# EAGLE board sparkfun-9dof-razor-imu-Panel-v30 (EAGLE 7.5.0), part 1 of 6
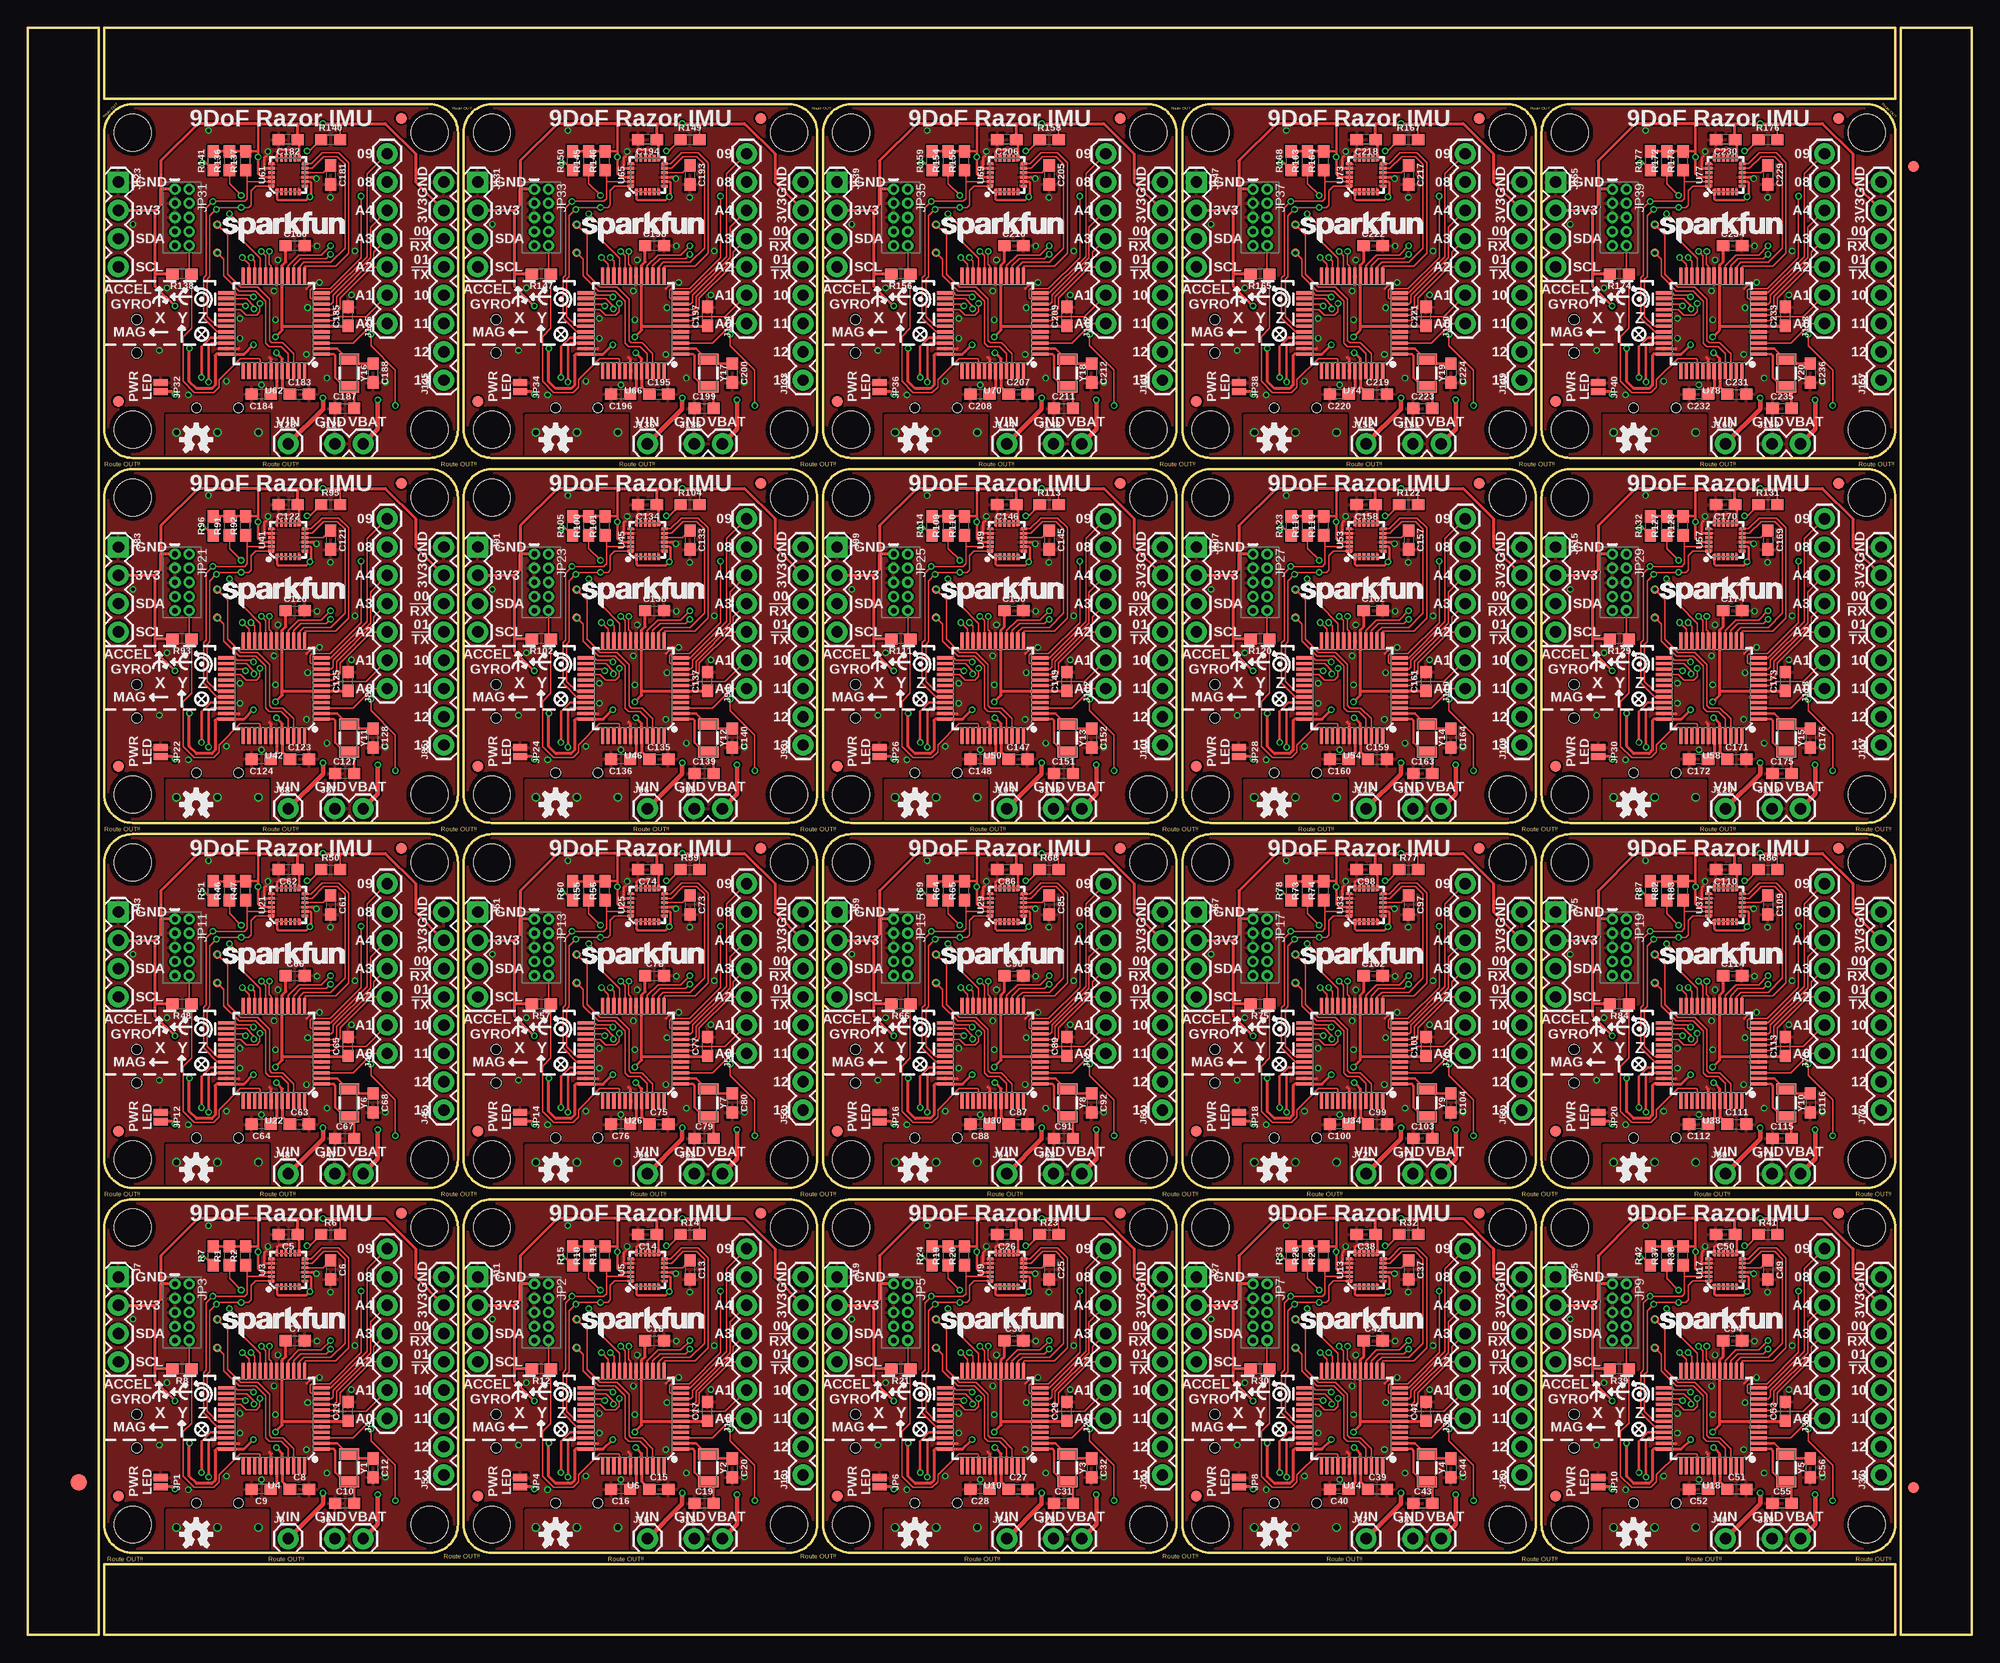
[diagram p0: board, top side]
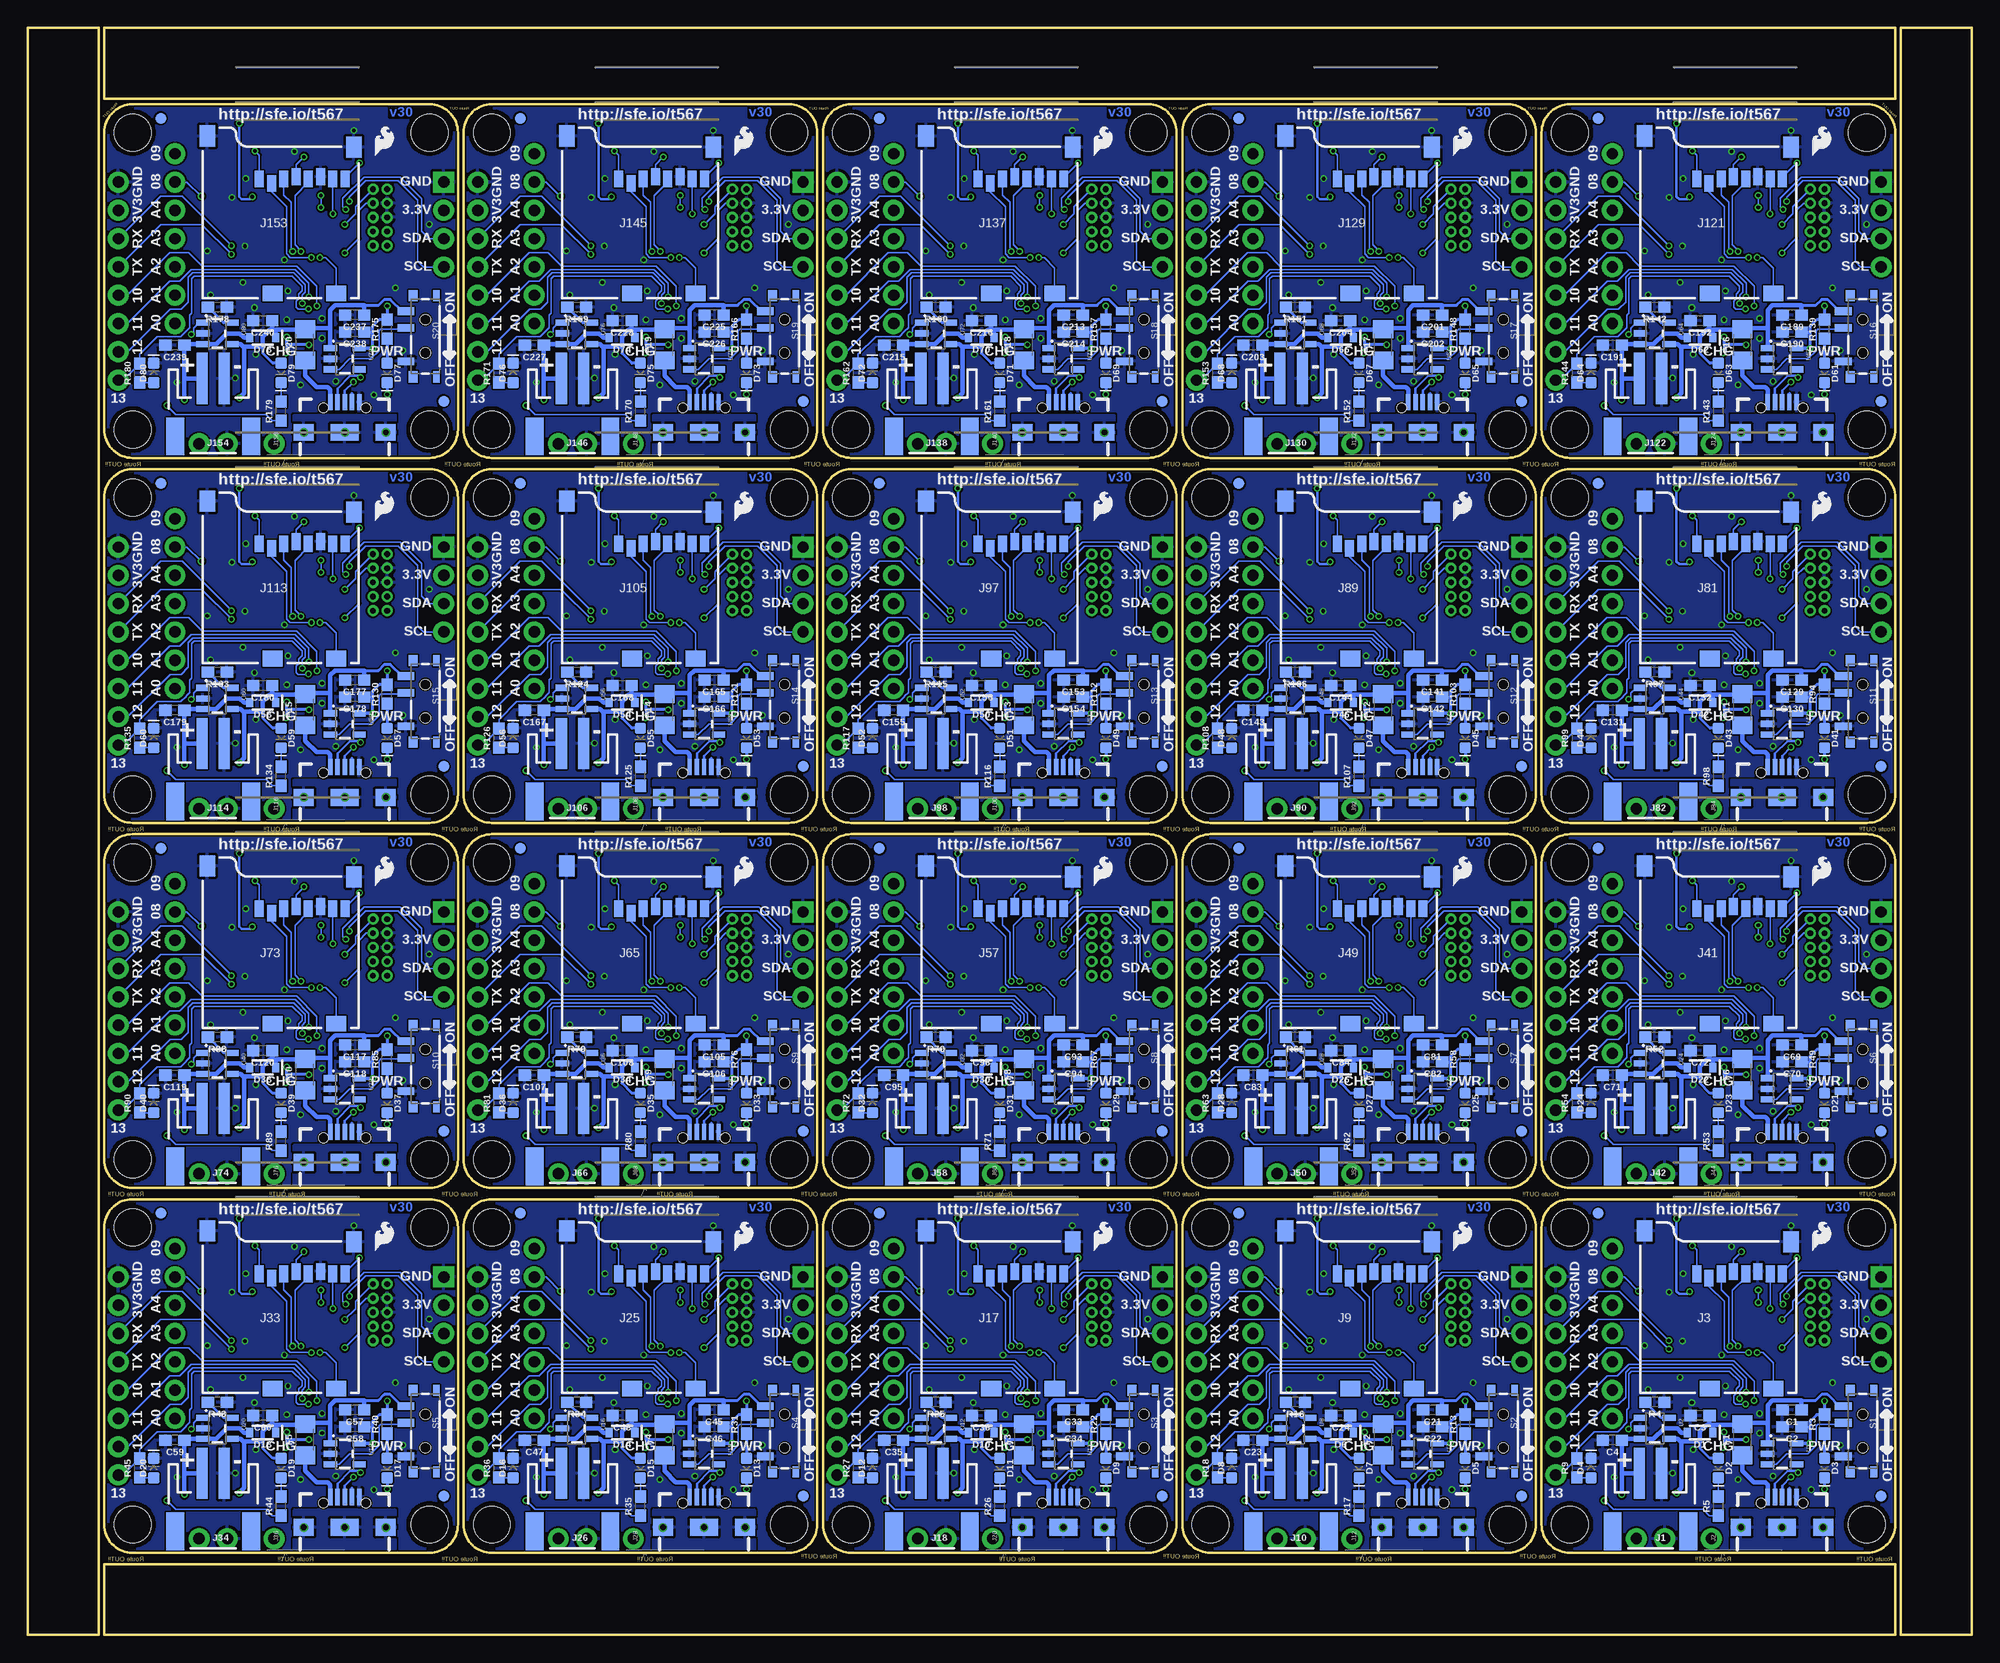
[diagram p1: board, bottom side, seen from below]

Size 174.5 x 144.27 mm. Coordinates in mm from the lower left corner, seen from the top.
Outline: 184 segments
Copper layers (1*16): Top 0.035mm / dielectric 1.5mm / Bottom 0.035mm
Design rules "SparkFun-2-layer-FAB-LIMIT *": minimum track width 4mil, minimum drill 6mil, track to track 6mil, track to pad 6mil, pad to pad 6mil, via to via 6mil, smd to smd 6mil, copper to edge 4mil, drill to drill 4mil, minimum pad ring 5mil, minimum via ring 5mil, stop-mask expansion 4mil, vias tented up to drill 25mil, thermal gap 10mil

## Footprints (pad centres in the part's own frame; a part is rotated, then mirrored left to right if it is on the bottom)
0603 = smd 1.1 x 1: 1 -0.85,0; 2 0.85,0
SOD-323 = smd 0.63 x 0.83: A 1.15,0; C -1.15,0
LED-0603 = smd 1 x 1: A -0.877,0; C 0.877,0
FIDUCIAL-1.5X3 = smd 1.5 x 1.5: 1 0,0
FIDUCIAL-1X2 = smd 1 x 1: 1 0,0
1206 = smd 1.6 x 1.8: 1 -1.4,0; 2 1.4,0
STAND-OFF = hole 3.302: 0,0
JST-2-SMD = smd 1 x 4.6: 1 -1,-3.7; 2 1,-3.7 | smd 1.6 x 3.4: NC1 -3.4,1.5; NC2 3.4,1.5
USB-B-MICRO-SMD_V03 = smd 1.45 x 0.4: D+ 2.725,0; D- 2.725,0.65; GND 2.725,-1.3; ID 2.725,-0.65; VBUS 2.725,1.3 | smd 1.5 x 1.8: SHIELD1 0,3.685; SHIELD2 0,-3.685 | smd 1.5 x 2.5: SHIELD3 0,0 | hole 0.85: 2.2,1.9; 2.2,-1.9
MICRO-SD-SOCKET-PP = smd 1.8 x 1.4: CD1 -2.05,0.4; CD2 -7.75,0.4 | smd 0.8 x 1.5: CS -7.84,10.3; DI -6.74,10.7; DO -2.34,10.7; GND -3.44,10.9; RSV1 -8.94,10.7; RSV2 -1.24,10.7; SCLK -4.54,10.7; VCC -5.64,10.9 | smd 1.4 x 1.9: GND1 -13.6,14.55; GND3 -0.45,13.55
1X07 = drill 1.016 pad 1.88: 1 0,0; 2 2.54,0; 3 5.08,0; 4 7.62,0; 5 10.16,0; 6 12.7,0; 7 15.24,0
1X08 = drill 1.016 pad 1.88: 1 0,0; 2 2.54,0; 3 5.08,0; 4 7.62,0; 5 10.16,0; 6 12.7,0; 7 15.24,0; 8 17.78,0
1X02 = drill 1.016 pad 1.88: 1 0,0; 2 2.54,0
1X04 = drill 1.016 pad 1.88 square: 1 0,0 | drill 1.016 pad 1.88: 2 2.54,0; 3 5.08,0; 4 7.62,0
1X01 = drill 1.016 pad 1.88: 1 0,0
SMT-JUMPER_2_NC_PASTE_NO-SILK = smd 0.635 x 1.27: 1 -0.406,0; 2 0.406,0
2X5-PTH-1.27MM = drill 0.508 pad 1: 1 -2.54,-0.635; 2 -2.54,0.635; 3 -1.27,-0.635; 4 -1.27,0.635; 5 0,-0.635; 6 0,0.635; 7 1.27,-0.635; 8 1.27,0.635; 9 2.54,-0.635; 10 2.54,0.635
SWITCH-SPST-SMD-A = smd 0.7 x 1.5: 1 -2.25,-1.75; 2 -0.75,-1.75; 3 2.25,-1.75 | smd 1 x 0.6: GND1 -3.65,1; GND3 3.65,1 | smd 1 x 0.8: GND2 -3.65,-1.1; GND4 3.65,-1.1 | hole 0.9: -1.5,0; 1.5,0
PAD.03X.03 = smd 0.762 x 0.762: P$1 0,0
SOT23-5 = smd 0.55 x 1.2: 1 -0.95,-1.3; 2 0,-1.3; 3 0.95,-1.3; 4 0.95,1.3; 5 -0.95,1.3
QFN24-3X3 = smd 0.495 x 0.25: 1 -1.552,1; 6 -1.552,-1; 13 1.552,-1; 18 1.552,1 | smd 0.6 x 0.25: 2 -1.5,0.6; 3 -1.5,0.2; 4 -1.5,-0.2; 5 -1.5,-0.6; 14 1.5,-0.6; 15 1.5,-0.2; 16 1.5,0.2; 17 1.5,0.6 | smd 0.25 x 0.495: 7 -1,-1.552; 12 1,-1.552; 19 1,1.552; 24 -1,1.552 | smd 0.25 x 0.6: 8 -0.6,-1.5; 9 -0.2,-1.5; 10 0.2,-1.5; 11 0.6,-1.5; 20 0.6,1.5; 21 0.2,1.5; 22 -0.2,1.5; 23 -0.6,1.5
TQFP-48 = smd 1.5 x 0.28: 1 -4.25,2.75; 2 -4.25,2.25; 3 -4.25,1.75; 4 -4.25,1.25; 5 -4.25,0.75; 6 -4.25,0.25; 7 -4.25,-0.25; 8 -4.25,-0.75; 9 -4.25,-1.25; 10 -4.25,-1.75; 11 -4.25,-2.25; 12 -4.25,-2.75; 25 4.25,-2.75; 26 4.25,-2.25; 27 4.25,-1.75; 28 4.25,-1.25; 29 4.25,-0.75; 30 4.25,-0.25; 31 4.25,0.25; 32 4.25,0.75; 33 4.25,1.25; 34 4.25,1.75; 35 4.25,2.25; 36 4.25,2.75 | smd 0.28 x 1.5: 13 -2.75,-4.25; 14 -2.25,-4.25; 15 -1.75,-4.25; 16 -1.25,-4.25; 17 -0.75,-4.25; 18 -0.25,-4.25; 19 0.25,-4.25; 20 0.75,-4.25; 21 1.25,-4.25; 22 1.75,-4.25; 23 2.25,-4.25; 24 2.75,-4.25; 37 2.75,4.25; 38 2.25,4.25; 39 1.75,4.25; 40 1.25,4.25; 41 0.75,4.25; 42 0.25,4.25; 43 -0.25,4.25; 44 -0.75,4.25; 45 -1.25,4.25; 46 -1.75,4.25; 47 -2.25,4.25; 48 -2.75,4.25
CRYSTAL-SMD-3.2X1.5MM = smd 1 x 1.8: P$1 -1.25,0; P$2 1.25,0

## Placement (x,y rotation side)
C1  1.0uF  [0603]  16.13,20.19 180 bottom
C2  2.2uF  [0603]  16.13,18.67 180 bottom
C3  4.7uF  [0603]  24.38,19.68 180 bottom
C4  4.7uF  [0603]  32.26,17.48 180 bottom
C5  0.1uF  [0603]  23.37,35.94 180 top
C6  0.1uF  [0603]  27.18,32.77 270 top
C7  0.1uF  [0603]  24,26.42 0 top
C8  0.1uF  [0603]  24.38,13.08 0 top
C9  0.1uF  [0603]  20.95,13.08 180 top
C10  15pF  [0603]  28.45,11.81 0 top
C11  0.1uF  [0603]  28.75,20.07 90 top
C12  15pF  [0603]  30.99,14.99 270 top
C13  0.1uF  [0603]  59.44,32.77 270 top
C14  0.1uF  [0603]  55.63,35.94 180 top
C15  0.1uF  [0603]  56.64,13.08 0 top
C16  0.1uF  [0603]  53.21,13.08 180 top
C17  0.1uF  [0603]  61.01,20.07 90 top
C18  0.1uF  [0603]  56.26,26.42 0 top
C19  15pF  [0603]  60.71,11.81 0 top
C20  15pF  [0603]  63.25,14.99 270 top
C21  1.0uF  [0603]  48.39,20.19 180 bottom
C22  2.2uF  [0603]  48.39,18.67 180 bottom
C23  4.7uF  [0603]  64.52,17.48 180 bottom
C24  4.7uF  [0603]  56.64,19.68 180 bottom
C25  0.1uF  [0603]  91.69,32.77 270 top
C26  0.1uF  [0603]  87.88,35.94 180 top
C27  0.1uF  [0603]  88.9,13.08 0 top
C28  0.1uF  [0603]  85.47,13.08 180 top
C29  0.1uF  [0603]  93.27,20.07 90 top
C30  0.1uF  [0603]  88.52,26.42 0 top
C31  15pF  [0603]  92.96,11.81 0 top
C32  15pF  [0603]  95.5,14.99 270 top
C33  1.0uF  [0603]  80.64,20.19 180 bottom
C34  2.2uF  [0603]  80.64,18.67 180 bottom
C35  4.7uF  [0603]  96.77,17.48 180 bottom
C36  4.7uF  [0603]  88.9,19.68 180 bottom
C37  0.1uF  [0603]  123.95,32.77 270 top
C38  0.1uF  [0603]  120.14,35.94 180 top
C39  0.1uF  [0603]  121.16,13.08 0 top
C40  0.1uF  [0603]  117.73,13.08 180 top
C41  0.1uF  [0603]  125.53,20.07 90 top
C42  0.1uF  [0603]  120.78,26.42 0 top
C43  15pF  [0603]  125.22,11.81 0 top
C44  15pF  [0603]  127.76,14.99 270 top
C45  1.0uF  [0603]  112.9,20.19 180 bottom
C46  2.2uF  [0603]  112.9,18.67 180 bottom
C47  4.7uF  [0603]  129.03,17.48 180 bottom
C48  4.7uF  [0603]  121.16,19.68 180 bottom
C49  0.1uF  [0603]  156.21,32.77 270 top
C50  0.1uF  [0603]  152.4,35.94 180 top
C51  0.1uF  [0603]  153.42,13.08 0 top
C52  0.1uF  [0603]  149.99,13.08 180 top
C53  0.1uF  [0603]  157.78,20.07 90 top
C54  0.1uF  [0603]  153.03,26.42 0 top
C55  15pF  [0603]  157.48,11.81 0 top
C56  15pF  [0603]  160.02,14.99 270 top
C57  1.0uF  [0603]  145.16,20.19 180 bottom
C58  2.2uF  [0603]  145.16,18.67 180 bottom
C59  4.7uF  [0603]  161.29,17.48 180 bottom
C60  4.7uF  [0603]  153.42,19.68 180 bottom
C61  0.1uF  [0603]  27.18,65.53 270 top
C62  0.1uF  [0603]  23.37,68.71 180 top
C63  0.1uF  [0603]  24.38,45.85 0 top
C64  0.1uF  [0603]  20.95,45.85 180 top
C65  0.1uF  [0603]  28.75,52.83 90 top
C66  0.1uF  [0603]  24,59.18 0 top
C67  15pF  [0603]  28.45,44.58 0 top
C68  15pF  [0603]  30.99,47.75 270 top
C69  1.0uF  [0603]  16.13,52.96 180 bottom
C70  2.2uF  [0603]  16.13,51.44 180 bottom
C71  4.7uF  [0603]  32.26,50.24 180 bottom
C72  4.7uF  [0603]  24.38,52.45 180 bottom
C73  0.1uF  [0603]  59.44,65.53 270 top
C74  0.1uF  [0603]  55.63,68.71 180 top
C75  0.1uF  [0603]  56.64,45.85 0 top
C76  0.1uF  [0603]  53.21,45.85 180 top
C77  0.1uF  [0603]  61.01,52.83 90 top
C78  0.1uF  [0603]  56.26,59.18 0 top
C79  15pF  [0603]  60.71,44.58 0 top
C80  15pF  [0603]  63.25,47.75 270 top
C81  1.0uF  [0603]  48.39,52.96 180 bottom
C82  2.2uF  [0603]  48.39,51.44 180 bottom
C83  4.7uF  [0603]  64.52,50.24 180 bottom
C84  4.7uF  [0603]  56.64,52.45 180 bottom
C85  0.1uF  [0603]  91.69,65.53 270 top
C86  0.1uF  [0603]  87.88,68.71 180 top
C87  0.1uF  [0603]  88.9,45.85 0 top
C88  0.1uF  [0603]  85.47,45.85 180 top
C89  0.1uF  [0603]  93.27,52.83 90 top
C90  0.1uF  [0603]  88.52,59.18 0 top
C91  15pF  [0603]  92.96,44.58 0 top
C92  15pF  [0603]  95.5,47.75 270 top
C93  1.0uF  [0603]  80.64,52.96 180 bottom
C94  2.2uF  [0603]  80.64,51.44 180 bottom
C95  4.7uF  [0603]  96.77,50.24 180 bottom
C96  4.7uF  [0603]  88.9,52.45 180 bottom
C97  0.1uF  [0603]  123.95,65.53 270 top
C98  0.1uF  [0603]  120.14,68.71 180 top
C99  0.1uF  [0603]  121.16,45.85 0 top
C100  0.1uF  [0603]  117.73,45.85 180 top
C101  0.1uF  [0603]  125.53,52.83 90 top
C102  0.1uF  [0603]  120.78,59.18 0 top
C103  15pF  [0603]  125.22,44.58 0 top
C104  15pF  [0603]  127.76,47.75 270 top
C105  1.0uF  [0603]  112.9,52.96 180 bottom
C106  2.2uF  [0603]  112.9,51.44 180 bottom
C107  4.7uF  [0603]  129.03,50.24 180 bottom
C108  4.7uF  [0603]  121.16,52.45 180 bottom
C109  0.1uF  [0603]  156.21,65.53 270 top
C110  0.1uF  [0603]  152.4,68.71 180 top
C111  0.1uF  [0603]  153.42,45.85 0 top
C112  0.1uF  [0603]  149.99,45.85 180 top
C113  0.1uF  [0603]  157.78,52.83 90 top
C114  0.1uF  [0603]  153.03,59.18 0 top
C115  15pF  [0603]  157.48,44.58 0 top
C116  15pF  [0603]  160.02,47.75 270 top
C117  1.0uF  [0603]  145.16,52.96 180 bottom
C118  2.2uF  [0603]  145.16,51.44 180 bottom
C119  4.7uF  [0603]  161.29,50.24 180 bottom
C120  4.7uF  [0603]  153.42,52.45 180 bottom
C121  0.1uF  [0603]  27.18,98.3 270 top
C122  0.1uF  [0603]  23.37,101.47 180 top
C123  0.1uF  [0603]  24.38,78.61 0 top
C124  0.1uF  [0603]  20.95,78.61 180 top
C125  0.1uF  [0603]  28.75,85.6 90 top
C126  0.1uF  [0603]  24,91.95 0 top
C127  15pF  [0603]  28.45,77.34 0 top
C128  15pF  [0603]  30.99,80.52 270 top
C129  1.0uF  [0603]  16.13,85.72 180 bottom
C130  2.2uF  [0603]  16.13,84.2 180 bottom
C131  4.7uF  [0603]  32.26,83.01 180 bottom
C132  4.7uF  [0603]  24.38,85.22 180 bottom
C133  0.1uF  [0603]  59.44,98.3 270 top
C134  0.1uF  [0603]  55.63,101.47 180 top
C135  0.1uF  [0603]  56.64,78.61 0 top
C136  0.1uF  [0603]  53.21,78.61 180 top
C137  0.1uF  [0603]  61.01,85.6 90 top
C138  0.1uF  [0603]  56.26,91.95 0 top
C139  15pF  [0603]  60.71,77.34 0 top
C140  15pF  [0603]  63.25,80.52 270 top
C141  1.0uF  [0603]  48.39,85.72 180 bottom
C142  2.2uF  [0603]  48.39,84.2 180 bottom
C143  4.7uF  [0603]  64.52,83.01 180 bottom
C144  4.7uF  [0603]  56.64,85.22 180 bottom
C145  0.1uF  [0603]  91.69,98.3 270 top
C146  0.1uF  [0603]  87.88,101.47 180 top
C147  0.1uF  [0603]  88.9,78.61 0 top
C148  0.1uF  [0603]  85.47,78.61 180 top
C149  0.1uF  [0603]  93.27,85.6 90 top
C150  0.1uF  [0603]  88.52,91.95 0 top
C151  15pF  [0603]  92.96,77.34 0 top
C152  15pF  [0603]  95.5,80.52 270 top
C153  1.0uF  [0603]  80.64,85.72 180 bottom
C154  2.2uF  [0603]  80.64,84.2 180 bottom
C155  4.7uF  [0603]  96.77,83.01 180 bottom
C156  4.7uF  [0603]  88.9,85.22 180 bottom
C157  0.1uF  [0603]  123.95,98.3 270 top
C158  0.1uF  [0603]  120.14,101.47 180 top
C159  0.1uF  [0603]  121.16,78.61 0 top
C160  0.1uF  [0603]  117.73,78.61 180 top
C161  0.1uF  [0603]  125.53,85.6 90 top
C162  0.1uF  [0603]  120.78,91.95 0 top
C163  15pF  [0603]  125.22,77.34 0 top
C164  15pF  [0603]  127.76,80.52 270 top
C165  1.0uF  [0603]  112.9,85.72 180 bottom
C166  2.2uF  [0603]  112.9,84.2 180 bottom
C167  4.7uF  [0603]  129.03,83.01 180 bottom
C168  4.7uF  [0603]  121.16,85.22 180 bottom
C169  0.1uF  [0603]  156.21,98.3 270 top
C170  0.1uF  [0603]  152.4,101.47 180 top
C171  0.1uF  [0603]  153.42,78.61 0 top
C172  0.1uF  [0603]  149.99,78.61 180 top
C173  0.1uF  [0603]  157.78,85.6 90 top
C174  0.1uF  [0603]  153.03,91.95 0 top
C175  15pF  [0603]  157.48,77.34 0 top
C176  15pF  [0603]  160.02,80.52 270 top
C177  1.0uF  [0603]  145.16,85.72 180 bottom
C178  2.2uF  [0603]  145.16,84.2 180 bottom
C179  4.7uF  [0603]  161.29,83.01 180 bottom
C180  4.7uF  [0603]  153.42,85.22 180 bottom
C181  0.1uF  [0603]  27.18,131.06 270 top
C182  0.1uF  [0603]  23.37,134.24 180 top
C183  0.1uF  [0603]  24.38,111.38 0 top
C184  0.1uF  [0603]  20.95,111.38 180 top
C185  0.1uF  [0603]  28.75,118.36 90 top
C186  0.1uF  [0603]  24,124.71 0 top
C187  15pF  [0603]  28.45,110.11 0 top
C188  15pF  [0603]  30.99,113.28 270 top
C189  1.0uF  [0603]  16.13,118.49 180 bottom
C190  2.2uF  [0603]  16.13,116.97 180 bottom
C191  4.7uF  [0603]  32.26,115.77 180 bottom
C192  4.7uF  [0603]  24.38,117.98 180 bottom
C193  0.1uF  [0603]  59.44,131.06 270 top
C194  0.1uF  [0603]  55.63,134.24 180 top
C195  0.1uF  [0603]  56.64,111.38 0 top
C196  0.1uF  [0603]  53.21,111.38 180 top
C197  0.1uF  [0603]  61.01,118.36 90 top
C198  0.1uF  [0603]  56.26,124.71 0 top
C199  15pF  [0603]  60.71,110.11 0 top
C200  15pF  [0603]  63.25,113.28 270 top
C201  1.0uF  [0603]  48.39,118.49 180 bottom
C202  2.2uF  [0603]  48.39,116.97 180 bottom
C203  4.7uF  [0603]  64.52,115.77 180 bottom
C204  4.7uF  [0603]  56.64,117.98 180 bottom
C205  0.1uF  [0603]  91.69,131.06 270 top
C206  0.1uF  [0603]  87.88,134.24 180 top
C207  0.1uF  [0603]  88.9,111.38 0 top
C208  0.1uF  [0603]  85.47,111.38 180 top
C209  0.1uF  [0603]  93.27,118.36 90 top
C210  0.1uF  [0603]  88.52,124.71 0 top
C211  15pF  [0603]  92.96,110.11 0 top
C212  15pF  [0603]  95.5,113.28 270 top
C213  1.0uF  [0603]  80.64,118.49 180 bottom
C214  2.2uF  [0603]  80.64,116.97 180 bottom
C215  4.7uF  [0603]  96.77,115.77 180 bottom
C216  4.7uF  [0603]  88.9,117.98 180 bottom
C217  0.1uF  [0603]  123.95,131.06 270 top
C218  0.1uF  [0603]  120.14,134.24 180 top
C219  0.1uF  [0603]  121.16,111.38 0 top
C220  0.1uF  [0603]  117.73,111.38 180 top
C221  0.1uF  [0603]  125.53,118.36 90 top
C222  0.1uF  [0603]  120.78,124.71 0 top
C223  15pF  [0603]  125.22,110.11 0 top
C224  15pF  [0603]  127.76,113.28 270 top
C225  1.0uF  [0603]  112.9,118.49 180 bottom
C226  2.2uF  [0603]  112.9,116.97 180 bottom
C227  4.7uF  [0603]  129.03,115.77 180 bottom
C228  4.7uF  [0603]  121.16,117.98 180 bottom
C229  0.1uF  [0603]  156.21,131.06 270 top
C230  0.1uF  [0603]  152.4,134.24 180 top
C231  0.1uF  [0603]  153.42,111.38 0 top
C232  0.1uF  [0603]  149.99,111.38 180 top
C233  0.1uF  [0603]  157.78,118.36 90 top
C234  0.1uF  [0603]  153.03,124.71 0 top
C235  15pF  [0603]  157.48,110.11 0 top
C236  15pF  [0603]  160.02,113.28 270 top
C237  1.0uF  [0603]  145.16,118.49 180 bottom
C238  2.2uF  [0603]  145.16,116.97 180 bottom
C239  4.7uF  [0603]  161.29,115.77 180 bottom
C240  4.7uF  [0603]  153.42,117.98 180 bottom
D1  1A/23V/620mV  [SOD-323]  24.38,18.16 180 bottom
D2  Yellow  [LED-0603]  22.73,14.99 270 bottom
D3  RED  [LED-0603]  13.21,14.99 270 bottom
D4  BLUE  [LED-0603]  34.16,14.99 90 bottom
D5  RED  [LED-0603]  45.47,14.99 270 bottom
D6  1A/23V/620mV  [SOD-323]  56.64,18.16 180 bottom
D7  Yellow  [LED-0603]  54.99,14.99 270 bottom
D8  BLUE  [LED-0603]  66.42,14.99 90 bottom
D9  RED  [LED-0603]  77.72,14.99 270 bottom
D10  1A/23V/620mV  [SOD-323]  88.9,18.16 180 bottom
D11  Yellow  [LED-0603]  87.25,14.99 270 bottom
D12  BLUE  [LED-0603]  98.68,14.99 90 bottom
D13  RED  [LED-0603]  109.98,14.99 270 bottom
D14  1A/23V/620mV  [SOD-323]  121.16,18.16 180 bottom
D15  Yellow  [LED-0603]  119.51,14.99 270 bottom
D16  BLUE  [LED-0603]  130.94,14.99 90 bottom
D17  RED  [LED-0603]  142.24,14.99 270 bottom
D18  1A/23V/620mV  [SOD-323]  153.42,18.16 180 bottom
D19  Yellow  [LED-0603]  151.76,14.99 270 bottom
D20  BLUE  [LED-0603]  163.19,14.99 90 bottom
D21  RED  [LED-0603]  13.21,47.75 270 bottom
D22  1A/23V/620mV  [SOD-323]  24.38,50.93 180 bottom
D23  Yellow  [LED-0603]  22.73,47.75 270 bottom
D24  BLUE  [LED-0603]  34.16,47.75 90 bottom
D25  RED  [LED-0603]  45.47,47.75 270 bottom
D26  1A/23V/620mV  [SOD-323]  56.64,50.93 180 bottom
D27  Yellow  [LED-0603]  54.99,47.75 270 bottom
D28  BLUE  [LED-0603]  66.42,47.75 90 bottom
D29  RED  [LED-0603]  77.72,47.75 270 bottom
D30  1A/23V/620mV  [SOD-323]  88.9,50.93 180 bottom
D31  Yellow  [LED-0603]  87.25,47.75 270 bottom
D32  BLUE  [LED-0603]  98.68,47.75 90 bottom
D33  RED  [LED-0603]  109.98,47.75 270 bottom
D34  1A/23V/620mV  [SOD-323]  121.16,50.93 180 bottom
D35  Yellow  [LED-0603]  119.51,47.75 270 bottom
D36  BLUE  [LED-0603]  130.94,47.75 90 bottom
D37  RED  [LED-0603]  142.24,47.75 270 bottom
D38  1A/23V/620mV  [SOD-323]  153.42,50.93 180 bottom
D39  Yellow  [LED-0603]  151.76,47.75 270 bottom
D40  BLUE  [LED-0603]  163.19,47.75 90 bottom
D41  RED  [LED-0603]  13.21,80.52 270 bottom
D42  1A/23V/620mV  [SOD-323]  24.38,83.69 180 bottom
D43  Yellow  [LED-0603]  22.73,80.52 270 bottom
D44  BLUE  [LED-0603]  34.16,80.52 90 bottom
D45  RED  [LED-0603]  45.47,80.52 270 bottom
D46  1A/23V/620mV  [SOD-323]  56.64,83.69 180 bottom
D47  Yellow  [LED-0603]  54.99,80.52 270 bottom
D48  BLUE  [LED-0603]  66.42,80.52 90 bottom
D49  RED  [LED-0603]  77.72,80.52 270 bottom
D50  1A/23V/620mV  [SOD-323]  88.9,83.69 180 bottom
D51  Yellow  [LED-0603]  87.25,80.52 270 bottom
D52  BLUE  [LED-0603]  98.68,80.52 90 bottom
D53  RED  [LED-0603]  109.98,80.52 270 bottom
D54  1A/23V/620mV  [SOD-323]  121.16,83.69 180 bottom
D55  Yellow  [LED-0603]  119.51,80.52 270 bottom
D56  BLUE  [LED-0603]  130.94,80.52 90 bottom
D57  RED  [LED-0603]  142.24,80.52 270 bottom
D58  1A/23V/620mV  [SOD-323]  153.42,83.69 180 bottom
D59  Yellow  [LED-0603]  151.76,80.52 270 bottom
D60  BLUE  [LED-0603]  163.19,80.52 90 bottom
D61  RED  [LED-0603]  13.21,113.28 270 bottom
D62  1A/23V/620mV  [SOD-323]  24.38,116.46 180 bottom
D63  Yellow  [LED-0603]  22.73,113.28 270 bottom
D64  BLUE  [LED-0603]  34.16,113.28 90 bottom
D65  RED  [LED-0603]  45.47,113.28 270 bottom
D66  1A/23V/620mV  [SOD-323]  56.64,116.46 180 bottom
D67  Yellow  [LED-0603]  54.99,113.28 270 bottom
D68  BLUE  [LED-0603]  66.42,113.28 90 bottom
D69  RED  [LED-0603]  77.72,113.28 270 bottom
D70  1A/23V/620mV  [SOD-323]  88.9,116.46 180 bottom
D71  Yellow  [LED-0603]  87.25,113.28 270 bottom
D72  BLUE  [LED-0603]  98.68,113.28 90 bottom
D73  RED  [LED-0603]  109.98,113.28 270 bottom
D74  1A/23V/620mV  [SOD-323]  121.16,116.46 180 bottom
D75  Yellow  [LED-0603]  119.51,113.28 270 bottom
D76  BLUE  [LED-0603]  130.94,113.28 90 bottom
D77  RED  [LED-0603]  142.24,113.28 270 bottom
D78  1A/23V/620mV  [SOD-323]  153.42,116.46 180 bottom
D79  Yellow  [LED-0603]  151.76,113.28 270 bottom
D80  BLUE  [LED-0603]  163.19,113.28 90 bottom
E$1  [FIDUCIAL-1.5X3]  4.57,13.72 0 top
E$7  [FIDUCIAL-1X2]  169.29,131.83 180 top
E$8  [FIDUCIAL-1X2]  169.29,13.21 0 top
F1  6V/0.5A  [1206]  20.57,17.53 90 bottom
F2  6V/0.5A  [1206]  52.83,17.53 90 bottom
F3  6V/0.5A  [1206]  85.09,17.53 90 bottom
F4  6V/0.5A  [1206]  117.35,17.53 90 bottom
F5  6V/0.5A  [1206]  149.61,17.53 90 bottom
F6  6V/0.5A  [1206]  20.57,50.29 90 bottom
F7  6V/0.5A  [1206]  52.83,50.29 90 bottom
F8  6V/0.5A  [1206]  85.09,50.29 90 bottom
F9  6V/0.5A  [1206]  117.35,50.29 90 bottom
F10  6V/0.5A  [1206]  149.61,50.29 90 bottom
F11  6V/0.5A  [1206]  20.57,83.06 90 bottom
F12  6V/0.5A  [1206]  52.83,83.06 90 bottom
F13  6V/0.5A  [1206]  85.09,83.06 90 bottom
F14  6V/0.5A  [1206]  117.35,83.06 90 bottom
F15  6V/0.5A  [1206]  149.61,83.06 90 bottom
F16  6V/0.5A  [1206]  20.57,115.82 90 bottom
F17  6V/0.5A  [1206]  52.83,115.82 90 bottom
F18  6V/0.5A  [1206]  85.09,115.82 90 bottom
F19  6V/0.5A  [1206]  117.35,115.82 90 bottom
F20  6V/0.5A  [1206]  149.61,115.82 90 bottom
FD1  FIDUCIAL1X2  [FIDUCIAL-1X2]  8.13,12.45 0 bottom
FD2  FIDUCIAL1X2  [FIDUCIAL-1X2]  33.53,37.85 0 top
FD3  FIDUCIAL1X2  [FIDUCIAL-1X2]  33.53,37.85 0 bottom
FD4  FIDUCIAL1X2  [FIDUCIAL-1X2]  8.13,12.45 0 top
FD5  FIDUCIAL1X2  [FIDUCIAL-1X2]  40.39,12.45 0 top
FD6  FIDUCIAL1X2  [FIDUCIAL-1X2]  65.79,37.85 0 top
FD7  FIDUCIAL1X2  [FIDUCIAL-1X2]  40.39,12.45 0 bottom
FD8  FIDUCIAL1X2  [FIDUCIAL-1X2]  65.79,37.85 0 bottom
FD9  FIDUCIAL1X2  [FIDUCIAL-1X2]  72.64,12.45 0 top
FD10  FIDUCIAL1X2  [FIDUCIAL-1X2]  98.04,37.85 0 top
FD11  FIDUCIAL1X2  [FIDUCIAL-1X2]  72.64,12.45 0 bottom
FD12  FIDUCIAL1X2  [FIDUCIAL-1X2]  98.04,37.85 0 bottom
FD13  FIDUCIAL1X2  [FIDUCIAL-1X2]  104.9,12.45 0 top
FD14  FIDUCIAL1X2  [FIDUCIAL-1X2]  130.3,37.85 0 top
FD15  FIDUCIAL1X2  [FIDUCIAL-1X2]  104.9,12.45 0 bottom
FD16  FIDUCIAL1X2  [FIDUCIAL-1X2]  130.3,37.85 0 bottom
FD17  FIDUCIAL1X2  [FIDUCIAL-1X2]  137.16,12.45 0 top
FD18  FIDUCIAL1X2  [FIDUCIAL-1X2]  162.56,37.85 0 top
FD19  FIDUCIAL1X2  [FIDUCIAL-1X2]  137.16,12.45 0 bottom
FD20  FIDUCIAL1X2  [FIDUCIAL-1X2]  162.56,37.85 0 bottom
FD21  FIDUCIAL1X2  [FIDUCIAL-1X2]  8.13,45.21 0 top
FD22  FIDUCIAL1X2  [FIDUCIAL-1X2]  33.53,70.61 0 top
FD23  FIDUCIAL1X2  [FIDUCIAL-1X2]  8.13,45.21 0 bottom
FD24  FIDUCIAL1X2  [FIDUCIAL-1X2]  33.53,70.61 0 bottom
FD25  FIDUCIAL1X2  [FIDUCIAL-1X2]  40.39,45.21 0 top
FD26  FIDUCIAL1X2  [FIDUCIAL-1X2]  65.79,70.61 0 top
FD27  FIDUCIAL1X2  [FIDUCIAL-1X2]  40.39,45.21 0 bottom
FD28  FIDUCIAL1X2  [FIDUCIAL-1X2]  65.79,70.61 0 bottom
FD29  FIDUCIAL1X2  [FIDUCIAL-1X2]  72.64,45.21 0 top
FD30  FIDUCIAL1X2  [FIDUCIAL-1X2]  98.04,70.61 0 top
FD31  FIDUCIAL1X2  [FIDUCIAL-1X2]  72.64,45.21 0 bottom
FD32  FIDUCIAL1X2  [FIDUCIAL-1X2]  98.04,70.61 0 bottom
FD33  FIDUCIAL1X2  [FIDUCIAL-1X2]  104.9,45.21 0 top
FD34  FIDUCIAL1X2  [FIDUCIAL-1X2]  130.3,70.61 0 top
FD35  FIDUCIAL1X2  [FIDUCIAL-1X2]  104.9,45.21 0 bottom
FD36  FIDUCIAL1X2  [FIDUCIAL-1X2]  130.3,70.61 0 bottom
FD37  FIDUCIAL1X2  [FIDUCIAL-1X2]  137.16,45.21 0 top
FD38  FIDUCIAL1X2  [FIDUCIAL-1X2]  162.56,70.61 0 top
FD39  FIDUCIAL1X2  [FIDUCIAL-1X2]  137.16,45.21 0 bottom
FD40  FIDUCIAL1X2  [FIDUCIAL-1X2]  162.56,70.61 0 bottom
FD41  FIDUCIAL1X2  [FIDUCIAL-1X2]  8.13,77.98 0 top
FD42  FIDUCIAL1X2  [FIDUCIAL-1X2]  33.53,103.38 0 top
FD43  FIDUCIAL1X2  [FIDUCIAL-1X2]  8.13,77.98 0 bottom
FD44  FIDUCIAL1X2  [FIDUCIAL-1X2]  33.53,103.38 0 bottom
FD45  FIDUCIAL1X2  [FIDUCIAL-1X2]  40.39,77.98 0 top
FD46  FIDUCIAL1X2  [FIDUCIAL-1X2]  65.79,103.38 0 top
FD47  FIDUCIAL1X2  [FIDUCIAL-1X2]  40.39,77.98 0 bottom
FD48  FIDUCIAL1X2  [FIDUCIAL-1X2]  65.79,103.38 0 bottom
FD49  FIDUCIAL1X2  [FIDUCIAL-1X2]  72.64,77.98 0 top
FD50  FIDUCIAL1X2  [FIDUCIAL-1X2]  98.04,103.38 0 top
FD51  FIDUCIAL1X2  [FIDUCIAL-1X2]  72.64,77.98 0 bottom
FD52  FIDUCIAL1X2  [FIDUCIAL-1X2]  98.04,103.38 0 bottom
FD53  FIDUCIAL1X2  [FIDUCIAL-1X2]  104.9,77.98 0 top
FD54  FIDUCIAL1X2  [FIDUCIAL-1X2]  130.3,103.38 0 top
FD55  FIDUCIAL1X2  [FIDUCIAL-1X2]  104.9,77.98 0 bottom
FD56  FIDUCIAL1X2  [FIDUCIAL-1X2]  130.3,103.38 0 bottom
FD57  FIDUCIAL1X2  [FIDUCIAL-1X2]  137.16,77.98 0 top
FD58  FIDUCIAL1X2  [FIDUCIAL-1X2]  162.56,103.38 0 top
FD59  FIDUCIAL1X2  [FIDUCIAL-1X2]  137.16,77.98 0 bottom
FD60  FIDUCIAL1X2  [FIDUCIAL-1X2]  162.56,103.38 0 bottom
FD61  FIDUCIAL1X2  [FIDUCIAL-1X2]  8.13,110.74 0 top
FD62  FIDUCIAL1X2  [FIDUCIAL-1X2]  33.53,136.14 0 top
FD63  FIDUCIAL1X2  [FIDUCIAL-1X2]  8.13,110.74 0 bottom
FD64  FIDUCIAL1X2  [FIDUCIAL-1X2]  33.53,136.14 0 bottom
FD65  FIDUCIAL1X2  [FIDUCIAL-1X2]  40.39,110.74 0 top
FD66  FIDUCIAL1X2  [FIDUCIAL-1X2]  65.79,136.14 0 top
FD67  FIDUCIAL1X2  [FIDUCIAL-1X2]  40.39,110.74 0 bottom
FD68  FIDUCIAL1X2  [FIDUCIAL-1X2]  65.79,136.14 0 bottom
FD69  FIDUCIAL1X2  [FIDUCIAL-1X2]  72.64,110.74 0 top
FD70  FIDUCIAL1X2  [FIDUCIAL-1X2]  98.04,136.14 0 top
FD71  FIDUCIAL1X2  [FIDUCIAL-1X2]  72.64,110.74 0 bottom
FD72  FIDUCIAL1X2  [FIDUCIAL-1X2]  98.04,136.14 0 bottom
FD73  FIDUCIAL1X2  [FIDUCIAL-1X2]  104.9,110.74 0 top
FD74  FIDUCIAL1X2  [FIDUCIAL-1X2]  130.3,136.14 0 top
FD75  FIDUCIAL1X2  [FIDUCIAL-1X2]  104.9,110.74 0 bottom
FD76  FIDUCIAL1X2  [FIDUCIAL-1X2]  130.3,136.14 0 bottom
FD77  FIDUCIAL1X2  [FIDUCIAL-1X2]  137.16,110.74 0 top
FD78  FIDUCIAL1X2  [FIDUCIAL-1X2]  162.56,136.14 0 top
FD79  FIDUCIAL1X2  [FIDUCIAL-1X2]  137.16,110.74 0 bottom
FD80  FIDUCIAL1X2  [FIDUCIAL-1X2]  162.56,136.14 0 bottom
H1  STAND-OFF  [STAND-OFF]  36.07,9.91 0 top
H2  STAND-OFF  [STAND-OFF]  9.4,9.91 0 top
H3  STAND-OFF  [STAND-OFF]  36.07,36.58 0 top
H4  STAND-OFF  [STAND-OFF]  9.4,36.58 0 top
H5  STAND-OFF  [STAND-OFF]  68.33,9.91 0 top
H6  STAND-OFF  [STAND-OFF]  41.66,9.91 0 top
H7  STAND-OFF  [STAND-OFF]  41.66,36.58 0 top
H8  STAND-OFF  [STAND-OFF]  68.33,36.58 0 top
H9  STAND-OFF  [STAND-OFF]  100.58,9.91 0 top
H10  STAND-OFF  [STAND-OFF]  73.91,9.91 0 top
H11  STAND-OFF  [STAND-OFF]  73.91,36.58 0 top
H12  STAND-OFF  [STAND-OFF]  100.58,36.58 0 top
H13  STAND-OFF  [STAND-OFF]  132.84,9.91 0 top
H14  STAND-OFF  [STAND-OFF]  106.17,9.91 0 top
H15  STAND-OFF  [STAND-OFF]  106.17,36.58 0 top
H16  STAND-OFF  [STAND-OFF]  132.84,36.58 0 top
H17  STAND-OFF  [STAND-OFF]  165.1,9.91 0 top
H18  STAND-OFF  [STAND-OFF]  138.43,9.91 0 top
H19  STAND-OFF  [STAND-OFF]  138.43,36.58 0 top
H20  STAND-OFF  [STAND-OFF]  165.1,36.58 0 top
H21  STAND-OFF  [STAND-OFF]  36.07,42.67 0 top
H22  STAND-OFF  [STAND-OFF]  9.4,42.67 0 top
H23  STAND-OFF  [STAND-OFF]  9.4,69.34 0 top
H24  STAND-OFF  [STAND-OFF]  36.07,69.34 0 top
H25  STAND-OFF  [STAND-OFF]  68.33,42.67 0 top
H26  STAND-OFF  [STAND-OFF]  41.66,42.67 0 top
H27  STAND-OFF  [STAND-OFF]  41.66,69.34 0 top
H28  STAND-OFF  [STAND-OFF]  68.33,69.34 0 top
H29  STAND-OFF  [STAND-OFF]  100.58,42.67 0 top
H30  STAND-OFF  [STAND-OFF]  73.91,42.67 0 top
H31  STAND-OFF  [STAND-OFF]  73.91,69.34 0 top
H32  STAND-OFF  [STAND-OFF]  100.58,69.34 0 top
H33  STAND-OFF  [STAND-OFF]  132.84,42.67 0 top
H34  STAND-OFF  [STAND-OFF]  106.17,42.67 0 top
H35  STAND-OFF  [STAND-OFF]  106.17,69.34 0 top
H36  STAND-OFF  [STAND-OFF]  132.84,69.34 0 top
H37  STAND-OFF  [STAND-OFF]  165.1,42.67 0 top
H38  STAND-OFF  [STAND-OFF]  138.43,42.67 0 top
H39  STAND-OFF  [STAND-OFF]  138.43,69.34 0 top
H40  STAND-OFF  [STAND-OFF]  165.1,69.34 0 top
H41  STAND-OFF  [STAND-OFF]  36.07,75.44 0 top
H42  STAND-OFF  [STAND-OFF]  9.4,75.44 0 top
H43  STAND-OFF  [STAND-OFF]  9.4,102.11 0 top
H44  STAND-OFF  [STAND-OFF]  36.07,102.11 0 top
H45  STAND-OFF  [STAND-OFF]  68.33,75.44 0 top
H46  STAND-OFF  [STAND-OFF]  41.66,75.44 0 top
H47  STAND-OFF  [STAND-OFF]  41.66,102.11 0 top
H48  STAND-OFF  [STAND-OFF]  68.33,102.11 0 top
H49  STAND-OFF  [STAND-OFF]  100.58,75.44 0 top
H50  STAND-OFF  [STAND-OFF]  73.91,75.44 0 top
H51  STAND-OFF  [STAND-OFF]  73.91,102.11 0 top
H52  STAND-OFF  [STAND-OFF]  100.58,102.11 0 top
H53  STAND-OFF  [STAND-OFF]  132.84,75.44 0 top
H54  STAND-OFF  [STAND-OFF]  106.17,75.44 0 top
H55  STAND-OFF  [STAND-OFF]  106.17,102.11 0 top
H56  STAND-OFF  [STAND-OFF]  132.84,102.11 0 top
H57  STAND-OFF  [STAND-OFF]  165.1,75.44 0 top
H58  STAND-OFF  [STAND-OFF]  138.43,75.44 0 top
H59  STAND-OFF  [STAND-OFF]  138.43,102.11 0 top
H60  STAND-OFF  [STAND-OFF]  165.1,102.11 0 top
H61  STAND-OFF  [STAND-OFF]  36.07,108.2 0 top
H62  STAND-OFF  [STAND-OFF]  9.4,108.2 0 top
H63  STAND-OFF  [STAND-OFF]  9.4,134.87 0 top
H64  STAND-OFF  [STAND-OFF]  36.07,134.87 0 top
H65  STAND-OFF  [STAND-OFF]  68.33,108.2 0 top
H66  STAND-OFF  [STAND-OFF]  41.66,108.2 0 top
H67  STAND-OFF  [STAND-OFF]  41.66,134.87 0 top
H68  STAND-OFF  [STAND-OFF]  68.33,134.87 0 top
H69  STAND-OFF  [STAND-OFF]  100.58,108.2 0 top
H70  STAND-OFF  [STAND-OFF]  73.91,108.2 0 top
H71  STAND-OFF  [STAND-OFF]  73.91,134.87 0 top
H72  STAND-OFF  [STAND-OFF]  100.58,134.87 0 top
H73  STAND-OFF  [STAND-OFF]  132.84,108.2 0 top
H74  STAND-OFF  [STAND-OFF]  106.17,108.2 0 top
H75  STAND-OFF  [STAND-OFF]  106.17,134.87 0 top
H76  STAND-OFF  [STAND-OFF]  132.84,134.87 0 top
H77  STAND-OFF  [STAND-OFF]  165.1,108.2 0 top
H78  STAND-OFF  [STAND-OFF]  138.43,108.2 0 top
H79  STAND-OFF  [STAND-OFF]  138.43,134.87 0 top
H80  STAND-OFF  [STAND-OFF]  165.1,134.87 0 top
J1  LiPo  [JST-2-SMD]  28.83,10.79 180 bottom
J2  [USB-B-MICRO-SMD_V03]  17.02,9.65 90 bottom
J3  USD_CONNECTOR  [MICRO-SD-SOCKET-PP]  15.75,21.72 0 bottom
J4  [1X07]  32.26,19.43 90 top
J5  [1X08]  37.34,14.35 90 top
J6  [1X02]  27.56,8.64 0 top
J7  [1X04]  8.13,32.13 270 top
J8  [1X01]  23.37,8.64 0 top
J9  USD_CONNECTOR  [MICRO-SD-SOCKET-PP]  48.01,21.72 0 bottom
J10  LiPo  [JST-2-SMD]  61.09,10.79 180 bottom
J11  [1X04]  40.39,32.13 270 top
J12  [USB-B-MICRO-SMD_V03]  49.28,9.65 90 bottom
J13  [1X08]  69.6,14.35 90 top
J14  [1X07]  64.52,19.43 90 top
J15  [1X02]  59.82,8.64 0 top
J16  [1X01]  55.63,8.64 0 top
J17  USD_CONNECTOR  [MICRO-SD-SOCKET-PP]  80.26,21.72 0 bottom
J18  LiPo  [JST-2-SMD]  93.34,10.79 180 bottom
J19  [1X04]  72.64,32.13 270 top
J20  [USB-B-MICRO-SMD_V03]  81.53,9.65 90 bottom
J21  [1X08]  101.85,14.35 90 top
J22  [1X07]  96.77,19.43 90 top
J23  [1X02]  92.08,8.64 0 top
J24  [1X01]  87.88,8.64 0 top
J25  USD_CONNECTOR  [MICRO-SD-SOCKET-PP]  112.52,21.72 0 bottom
J26  LiPo  [JST-2-SMD]  125.6,10.79 180 bottom
J27  [1X04]  104.9,32.13 270 top
J28  [USB-B-MICRO-SMD_V03]  113.79,9.65 90 bottom
J29  [1X08]  134.11,14.35 90 top
J30  [1X07]  129.03,19.43 90 top
J31  [1X02]  124.33,8.64 0 top
J32  [1X01]  120.14,8.64 0 top
J33  USD_CONNECTOR  [MICRO-SD-SOCKET-PP]  144.78,21.72 0 bottom
J34  LiPo  [JST-2-SMD]  157.86,10.79 180 bottom
J35  [1X04]  137.16,32.13 270 top
J36  [USB-B-MICRO-SMD_V03]  146.05,9.65 90 bottom
J37  [1X08]  166.37,14.35 90 top
J38  [1X07]  161.29,19.43 90 top
J39  [1X02]  156.59,8.64 0 top
J40  [1X01]  152.4,8.64 0 top
J41  USD_CONNECTOR  [MICRO-SD-SOCKET-PP]  15.75,54.48 0 bottom
J42  LiPo  [JST-2-SMD]  28.83,43.56 180 bottom
J43  [1X04]  8.13,64.9 270 top
J44  [USB-B-MICRO-SMD_V03]  17.02,42.42 90 bottom
J45  [1X08]  37.34,47.12 90 top
J46  [1X07]  32.26,52.2 90 top
J47  [1X02]  27.56,41.4 0 top
J48  [1X01]  23.37,41.4 0 top
J49  USD_CONNECTOR  [MICRO-SD-SOCKET-PP]  48.01,54.48 0 bottom
J50  LiPo  [JST-2-SMD]  61.09,43.56 180 bottom
J51  [1X04]  40.39,64.9 270 top
J52  [USB-B-MICRO-SMD_V03]  49.28,42.42 90 bottom
J53  [1X08]  69.6,47.12 90 top
J54  [1X07]  64.52,52.2 90 top
J55  [1X02]  59.82,41.4 0 top
J56  [1X01]  55.63,41.4 0 top
J57  USD_CONNECTOR  [MICRO-SD-SOCKET-PP]  80.26,54.48 0 bottom
J58  LiPo  [JST-2-SMD]  93.34,43.56 180 bottom
J59  [1X04]  72.64,64.9 270 top
J60  [USB-B-MICRO-SMD_V03]  81.53,42.42 90 bottom
J61  [1X08]  101.85,47.12 90 top
J62  [1X07]  96.77,52.2 90 top
J63  [1X02]  92.08,41.4 0 top
J64  [1X01]  87.88,41.4 0 top
J65  USD_CONNECTOR  [MICRO-SD-SOCKET-PP]  112.52,54.48 0 bottom
J66  LiPo  [JST-2-SMD]  125.6,43.56 180 bottom
J67  [1X04]  104.9,64.9 270 top
J68  [USB-B-MICRO-SMD_V03]  113.79,42.42 90 bottom
J69  [1X08]  134.11,47.12 90 top
J70  [1X07]  129.03,52.2 90 top
J71  [1X02]  124.33,41.4 0 top
J72  [1X01]  120.14,41.4 0 top
J73  USD_CONNECTOR  [MICRO-SD-SOCKET-PP]  144.78,54.48 0 bottom
J74  LiPo  [JST-2-SMD]  157.86,43.56 180 bottom
J75  [1X04]  137.16,64.9 270 top
J76  [USB-B-MICRO-SMD_V03]  146.05,42.42 90 bottom
J77  [1X08]  166.37,47.12 90 top
J78  [1X07]  161.29,52.2 90 top
J79  [1X02]  156.59,41.4 0 top
J80  [1X01]  152.4,41.4 0 top
J81  USD_CONNECTOR  [MICRO-SD-SOCKET-PP]  15.75,87.25 0 bottom
J82  LiPo  [JST-2-SMD]  28.83,76.33 180 bottom
J83  [1X04]  8.13,97.66 270 top
J84  [USB-B-MICRO-SMD_V03]  17.02,75.18 90 bottom
J85  [1X08]  37.34,79.88 90 top
J86  [1X07]  32.26,84.96 90 top
J87  [1X02]  27.56,74.17 0 top
J88  [1X01]  23.37,74.17 0 top
J89  USD_CONNECTOR  [MICRO-SD-SOCKET-PP]  48.01,87.25 0 bottom
J90  LiPo  [JST-2-SMD]  61.09,76.33 180 bottom
J91  [1X04]  40.39,97.66 270 top
J92  [USB-B-MICRO-SMD_V03]  49.28,75.18 90 bottom
J93  [1X08]  69.6,79.88 90 top
J94  [1X07]  64.52,84.96 90 top
J95  [1X02]  59.82,74.17 0 top
J96  [1X01]  55.63,74.17 0 top
J97  USD_CONNECTOR  [MICRO-SD-SOCKET-PP]  80.26,87.25 0 bottom
J98  LiPo  [JST-2-SMD]  93.34,76.33 180 bottom
J99  [1X04]  72.64,97.66 270 top
J100  [USB-B-MICRO-SMD_V03]  81.53,75.18 90 bottom
J101  [1X08]  101.85,79.88 90 top
J102  [1X07]  96.77,84.96 90 top
J103  [1X02]  92.08,74.17 0 top
J104  [1X01]  87.88,74.17 0 top
J105  USD_CONNECTOR  [MICRO-SD-SOCKET-PP]  112.52,87.25 0 bottom
J106  LiPo  [JST-2-SMD]  125.6,76.33 180 bottom
J107  [1X04]  104.9,97.66 270 top
J108  [USB-B-MICRO-SMD_V03]  113.79,75.18 90 bottom
J109  [1X08]  134.11,79.88 90 top
J110  [1X07]  129.03,84.96 90 top
J111  [1X02]  124.33,74.17 0 top
J112  [1X01]  120.14,74.17 0 top
J113  USD_CONNECTOR  [MICRO-SD-SOCKET-PP]  144.78,87.25 0 bottom
J114  LiPo  [JST-2-SMD]  157.86,76.33 180 bottom
J115  [1X04]  137.16,97.66 270 top
J116  [USB-B-MICRO-SMD_V03]  146.05,75.18 90 bottom
J117  [1X08]  166.37,79.88 90 top
J118  [1X07]  161.29,84.96 90 top
J119  [1X02]  156.59,74.17 0 top
J120  [1X01]  152.4,74.17 0 top
J121  USD_CONNECTOR  [MICRO-SD-SOCKET-PP]  15.75,120.02 0 bottom
J122  LiPo  [JST-2-SMD]  28.83,109.09 180 bottom
J123  [1X04]  8.13,130.43 270 top
J124  [USB-B-MICRO-SMD_V03]  17.02,107.95 90 bottom
J125  [1X08]  37.34,112.65 90 top
J126  [1X07]  32.26,117.73 90 top
J127  [1X02]  27.56,106.93 0 top
J128  [1X01]  23.37,106.93 0 top
J129  USD_CONNECTOR  [MICRO-SD-SOCKET-PP]  48.01,120.02 0 bottom
J130  LiPo  [JST-2-SMD]  61.09,109.09 180 bottom
J131  [1X04]  40.39,130.43 270 top
J132  [USB-B-MICRO-SMD_V03]  49.28,107.95 90 bottom
J133  [1X08]  69.6,112.65 90 top
J134  [1X07]  64.52,117.73 90 top
J135  [1X02]  59.82,106.93 0 top
J136  [1X01]  55.63,106.93 0 top
J137  USD_CONNECTOR  [MICRO-SD-SOCKET-PP]  80.26,120.02 0 bottom
J138  LiPo  [JST-2-SMD]  93.34,109.09 180 bottom
J139  [1X04]  72.64,130.43 270 top
J140  [USB-B-MICRO-SMD_V03]  81.53,107.95 90 bottom
J141  [1X08]  101.85,112.65 90 top
J142  [1X07]  96.77,117.73 90 top
J143  [1X02]  92.08,106.93 0 top
J144  [1X01]  87.88,106.93 0 top
J145  USD_CONNECTOR  [MICRO-SD-SOCKET-PP]  112.52,120.02 0 bottom
J146  LiPo  [JST-2-SMD]  125.6,109.09 180 bottom
J147  [1X04]  104.9,130.43 270 top
J148  [USB-B-MICRO-SMD_V03]  113.79,107.95 90 bottom
J149  [1X08]  134.11,112.65 90 top
J150  [1X07]  129.03,117.73 90 top
J151  [1X02]  124.33,106.93 0 top
J152  [1X01]  120.14,106.93 0 top
J153  USD_CONNECTOR  [MICRO-SD-SOCKET-PP]  144.78,120.02 0 bottom
J154  LiPo  [JST-2-SMD]  157.86,109.09 180 bottom
J155  [1X04]  137.16,130.43 270 top
J156  [USB-B-MICRO-SMD_V03]  146.05,107.95 90 bottom
J157  [1X08]  166.37,112.65 90 top
J158  [1X07]  161.29,117.73 90 top
J159  [1X02]  156.59,106.93 0 top
J160  [1X01]  152.4,106.93 0 top
JP1  LED  [SMT-JUMPER_2_NC_PASTE_NO-SILK]  11.94,13.72 270 top
JP2  CORTEX_DEBUGPTH  [2X5-PTH-1.27MM]  46.1,28.96 270 top
JP3  CORTEX_DEBUGPTH  [2X5-PTH-1.27MM]  13.84,28.96 270 top
JP4  LED  [SMT-JUMPER_2_NC_PASTE_NO-SILK]  44.2,13.72 270 top
JP5  CORTEX_DEBUGPTH  [2X5-PTH-1.27MM]  78.36,28.96 270 top
JP6  LED  [SMT-JUMPER_2_NC_PASTE_NO-SILK]  76.45,13.72 270 top
JP7  CORTEX_DEBUGPTH  [2X5-PTH-1.27MM]  110.62,28.96 270 top
JP8  LED  [SMT-JUMPER_2_NC_PASTE_NO-SILK]  108.71,13.72 270 top
JP9  CORTEX_DEBUGPTH  [2X5-PTH-1.27MM]  142.88,28.96 270 top
JP10  LED  [SMT-JUMPER_2_NC_PASTE_NO-SILK]  140.97,13.72 270 top
JP11  CORTEX_DEBUGPTH  [2X5-PTH-1.27MM]  13.84,61.72 270 top
JP12  LED  [SMT-JUMPER_2_NC_PASTE_NO-SILK]  11.94,46.48 270 top
JP13  CORTEX_DEBUGPTH  [2X5-PTH-1.27MM]  46.1,61.72 270 top
JP14  LED  [SMT-JUMPER_2_NC_PASTE_NO-SILK]  44.2,46.48 270 top
JP15  CORTEX_DEBUGPTH  [2X5-PTH-1.27MM]  78.36,61.72 270 top
JP16  LED  [SMT-JUMPER_2_NC_PASTE_NO-SILK]  76.45,46.48 270 top
JP17  CORTEX_DEBUGPTH  [2X5-PTH-1.27MM]  110.62,61.72 270 top
JP18  LED  [SMT-JUMPER_2_NC_PASTE_NO-SILK]  108.71,46.48 270 top
JP19  CORTEX_DEBUGPTH  [2X5-PTH-1.27MM]  142.88,61.72 270 top
JP20  LED  [SMT-JUMPER_2_NC_PASTE_NO-SILK]  140.97,46.48 270 top
JP21  CORTEX_DEBUGPTH  [2X5-PTH-1.27MM]  13.84,94.49 270 top
JP22  LED  [SMT-JUMPER_2_NC_PASTE_NO-SILK]  11.94,79.25 270 top
JP23  CORTEX_DEBUGPTH  [2X5-PTH-1.27MM]  46.1,94.49 270 top
JP24  LED  [SMT-JUMPER_2_NC_PASTE_NO-SILK]  44.2,79.25 270 top
JP25  CORTEX_DEBUGPTH  [2X5-PTH-1.27MM]  78.36,94.49 270 top
JP26  LED  [SMT-JUMPER_2_NC_PASTE_NO-SILK]  76.45,79.25 270 top
JP27  CORTEX_DEBUGPTH  [2X5-PTH-1.27MM]  110.62,94.49 270 top
JP28  LED  [SMT-JUMPER_2_NC_PASTE_NO-SILK]  108.71,79.25 270 top
JP29  CORTEX_DEBUGPTH  [2X5-PTH-1.27MM]  142.88,94.49 270 top
JP30  LED  [SMT-JUMPER_2_NC_PASTE_NO-SILK]  140.97,79.25 270 top
JP31  CORTEX_DEBUGPTH  [2X5-PTH-1.27MM]  13.84,127.25 270 top
JP32  LED  [SMT-JUMPER_2_NC_PASTE_NO-SILK]  11.94,112.01 270 top
JP33  CORTEX_DEBUGPTH  [2X5-PTH-1.27MM]  46.1,127.25 270 top
JP34  LED  [SMT-JUMPER_2_NC_PASTE_NO-SILK]  44.2,112.01 270 top
JP35  CORTEX_DEBUGPTH  [2X5-PTH-1.27MM]  78.36,127.25 270 top
JP36  LED  [SMT-JUMPER_2_NC_PASTE_NO-SILK]  76.45,112.01 270 top
JP37  CORTEX_DEBUGPTH  [2X5-PTH-1.27MM]  110.62,127.25 270 top
JP38  LED  [SMT-JUMPER_2_NC_PASTE_NO-SILK]  108.71,112.01 270 top
JP39  CORTEX_DEBUGPTH  [2X5-PTH-1.27MM]  142.88,127.25 270 top
JP40  LED  [SMT-JUMPER_2_NC_PASTE_NO-SILK]  140.97,112.01 270 top
LOGO1  SFE_LOGO_FLAME.1_INCH  [SFE_LOGO_FLAME_.1]  14.61,34.16 0 bottom
LOGO2  OSHW-LOGOS  [OSHW-LOGO-S]  15.11,9.02 0 top
LOGO3  SFE_LOGO_NAME.1_INCH  [SFE_LOGO_NAME_.1]  17.02,26.16 0 top
LOGO4  SFE_LOGO_FLAME.1_INCH  [SFE_LOGO_FLAME_.1]  46.86,34.16 0 bottom
LOGO5  OSHW-LOGOS  [OSHW-LOGO-S]  47.37,9.02 0 top
LOGO6  SFE_LOGO_NAME.1_INCH  [SFE_LOGO_NAME_.1]  49.28,26.16 0 top
LOGO7  SFE_LOGO_FLAME.1_INCH  [SFE_LOGO_FLAME_.1]  79.12,34.16 0 bottom
LOGO8  OSHW-LOGOS  [OSHW-LOGO-S]  79.63,9.02 0 top
LOGO9  SFE_LOGO_NAME.1_INCH  [SFE_LOGO_NAME_.1]  81.53,26.16 0 top
LOGO10  SFE_LOGO_FLAME.1_INCH  [SFE_LOGO_FLAME_.1]  111.38,34.16 0 bottom
LOGO11  OSHW-LOGOS  [OSHW-LOGO-S]  111.89,9.02 0 top
LOGO12  SFE_LOGO_NAME.1_INCH  [SFE_LOGO_NAME_.1]  113.79,26.16 0 top
LOGO13  SFE_LOGO_FLAME.1_INCH  [SFE_LOGO_FLAME_.1]  143.64,34.16 0 bottom
LOGO14  OSHW-LOGOS  [OSHW-LOGO-S]  144.15,9.02 0 top
LOGO15  SFE_LOGO_NAME.1_INCH  [SFE_LOGO_NAME_.1]  146.05,26.16 0 top
LOGO16  SFE_LOGO_FLAME.1_INCH  [SFE_LOGO_FLAME_.1]  14.61,66.93 0 bottom
LOGO17  OSHW-LOGOS  [OSHW-LOGO-S]  15.11,41.78 0 top
LOGO18  SFE_LOGO_NAME.1_INCH  [SFE_LOGO_NAME_.1]  17.02,58.93 0 top
LOGO19  SFE_LOGO_FLAME.1_INCH  [SFE_LOGO_FLAME_.1]  46.86,66.93 0 bottom
LOGO20  OSHW-LOGOS  [OSHW-LOGO-S]  47.37,41.78 0 top
LOGO21  SFE_LOGO_NAME.1_INCH  [SFE_LOGO_NAME_.1]  49.28,58.93 0 top
LOGO22  SFE_LOGO_FLAME.1_INCH  [SFE_LOGO_FLAME_.1]  79.12,66.93 0 bottom
LOGO23  OSHW-LOGOS  [OSHW-LOGO-S]  79.63,41.78 0 top
LOGO24  SFE_LOGO_NAME.1_INCH  [SFE_LOGO_NAME_.1]  81.53,58.93 0 top
LOGO25  SFE_LOGO_FLAME.1_INCH  [SFE_LOGO_FLAME_.1]  111.38,66.93 0 bottom
LOGO26  OSHW-LOGOS  [OSHW-LOGO-S]  111.89,41.78 0 top
LOGO27  SFE_LOGO_NAME.1_INCH  [SFE_LOGO_NAME_.1]  113.79,58.93 0 top
LOGO28  SFE_LOGO_FLAME.1_INCH  [SFE_LOGO_FLAME_.1]  143.64,66.93 0 bottom
LOGO29  OSHW-LOGOS  [OSHW-LOGO-S]  144.15,41.78 0 top
LOGO30  SFE_LOGO_NAME.1_INCH  [SFE_LOGO_NAME_.1]  146.05,58.93 0 top
LOGO31  SFE_LOGO_FLAME.1_INCH  [SFE_LOGO_FLAME_.1]  14.61,99.69 0 bottom
LOGO32  OSHW-LOGOS  [OSHW-LOGO-S]  15.11,74.55 0 top
LOGO33  SFE_LOGO_NAME.1_INCH  [SFE_LOGO_NAME_.1]  17.02,91.69 0 top
LOGO34  SFE_LOGO_FLAME.1_INCH  [SFE_LOGO_FLAME_.1]  46.86,99.69 0 bottom
LOGO35  OSHW-LOGOS  [OSHW-LOGO-S]  47.37,74.55 0 top
LOGO36  SFE_LOGO_NAME.1_INCH  [SFE_LOGO_NAME_.1]  49.28,91.69 0 top
LOGO37  SFE_LOGO_FLAME.1_INCH  [SFE_LOGO_FLAME_.1]  79.12,99.69 0 bottom
LOGO38  OSHW-LOGOS  [OSHW-LOGO-S]  79.63,74.55 0 top
LOGO39  SFE_LOGO_NAME.1_INCH  [SFE_LOGO_NAME_.1]  81.53,91.69 0 top
LOGO40  SFE_LOGO_FLAME.1_INCH  [SFE_LOGO_FLAME_.1]  111.38,99.69 0 bottom
LOGO41  OSHW-LOGOS  [OSHW-LOGO-S]  111.89,74.55 0 top
LOGO42  SFE_LOGO_NAME.1_INCH  [SFE_LOGO_NAME_.1]  113.79,91.69 0 top
LOGO43  SFE_LOGO_FLAME.1_INCH  [SFE_LOGO_FLAME_.1]  143.64,99.69 0 bottom
LOGO44  OSHW-LOGOS  [OSHW-LOGO-S]  144.15,74.55 0 top
LOGO45  SFE_LOGO_NAME.1_INCH  [SFE_LOGO_NAME_.1]  146.05,91.69 0 top
LOGO46  SFE_LOGO_FLAME.1_INCH  [SFE_LOGO_FLAME_.1]  14.61,132.46 0 bottom
LOGO47  OSHW-LOGOS  [OSHW-LOGO-S]  15.11,107.31 0 top
LOGO48  SFE_LOGO_NAME.1_INCH  [SFE_LOGO_NAME_.1]  17.02,124.46 0 top
LOGO49  SFE_LOGO_FLAME.1_INCH  [SFE_LOGO_FLAME_.1]  46.86,132.46 0 bottom
LOGO50  OSHW-LOGOS  [OSHW-LOGO-S]  47.37,107.31 0 top
LOGO51  SFE_LOGO_NAME.1_INCH  [SFE_LOGO_NAME_.1]  49.28,124.46 0 top
LOGO52  SFE_LOGO_FLAME.1_INCH  [SFE_LOGO_FLAME_.1]  79.12,132.46 0 bottom
LOGO53  OSHW-LOGOS  [OSHW-LOGO-S]  79.63,107.31 0 top
LOGO54  SFE_LOGO_NAME.1_INCH  [SFE_LOGO_NAME_.1]  81.53,124.46 0 top
LOGO55  SFE_LOGO_FLAME.1_INCH  [SFE_LOGO_FLAME_.1]  111.38,132.46 0 bottom
LOGO56  OSHW-LOGOS  [OSHW-LOGO-S]  111.89,107.31 0 top
LOGO57  SFE_LOGO_NAME.1_INCH  [SFE_LOGO_NAME_.1]  113.79,124.46 0 top
LOGO58  SFE_LOGO_FLAME.1_INCH  [SFE_LOGO_FLAME_.1]  143.64,132.46 0 bottom
LOGO59  OSHW-LOGOS  [OSHW-LOGO-S]  144.15,107.31 0 top
LOGO60  SFE_LOGO_NAME.1_INCH  [SFE_LOGO_NAME_.1]  146.05,124.46 0 top
R1  4.7k  [0603]  18.1,34.04 90 top
R2  4.7k  [0603]  19.56,34.04 90 top
R3  1k  [0603]  13.21,18.92 90 bottom
R4  2.2k  [0603]  28.45,20.89 180 bottom
R5  1k  [0603]  22.73,11.56 90 bottom
R6  100k  [0603]  27.18,35.94 0 top
R7  100k  [0603]  16.64,34.04 90 top
R8  10k  [0603]  13.84,23.88 180 top
R9  1k  [0603]  35.43,14.99 90 bottom
R10  4.7k  [0603]  50.36,34.04 90 top
R11  4.7k  [0603]  51.82,34.04 90 top
R12  10k  [0603]  46.1,23.88 180 top
R13  1k  [0603]  45.47,18.92 90 bottom
R14  100k  [0603]  59.44,35.94 0 top
R15  100k  [0603]  48.9,34.04 90 top
R16  2.2k  [0603]  60.71,20.89 180 bottom
R17  1k  [0603]  54.99,11.56 90 bottom
R18  1k  [0603]  67.69,14.99 90 bottom
R19  4.7k  [0603]  82.61,34.04 90 top
R20  4.7k  [0603]  84.07,34.04 90 top
R21  10k  [0603]  78.36,23.88 180 top
R22  1k  [0603]  77.72,18.92 90 bottom
R23  100k  [0603]  91.69,35.94 0 top
R24  100k  [0603]  81.15,34.04 90 top
R25  2.2k  [0603]  92.96,20.89 180 bottom
R26  1k  [0603]  87.25,11.56 90 bottom
R27  1k  [0603]  99.95,14.99 90 bottom
R28  4.7k  [0603]  114.87,34.04 90 top
R29  4.7k  [0603]  116.33,34.04 90 top
R30  10k  [0603]  110.62,23.88 180 top
R31  1k  [0603]  109.98,18.92 90 bottom
R32  100k  [0603]  123.95,35.94 0 top
R33  100k  [0603]  113.41,34.04 90 top
R34  2.2k  [0603]  125.22,20.89 180 bottom
R35  1k  [0603]  119.51,11.56 90 bottom
R36  1k  [0603]  132.21,14.99 90 bottom
R37  4.7k  [0603]  147.13,34.04 90 top
R38  4.7k  [0603]  148.59,34.04 90 top
R39  10k  [0603]  142.88,23.88 180 top
R40  1k  [0603]  142.24,18.92 90 bottom
R41  100k  [0603]  156.21,35.94 0 top
R42  100k  [0603]  145.67,34.04 90 top
R43  2.2k  [0603]  157.48,20.89 180 bottom
R44  1k  [0603]  151.76,11.56 90 bottom
R45  1k  [0603]  164.47,14.99 90 bottom
R46  4.7k  [0603]  18.1,66.8 90 top
R47  4.7k  [0603]  19.56,66.8 90 top
R48  10k  [0603]  13.84,56.64 180 top
R49  1k  [0603]  13.21,51.69 90 bottom
R50  100k  [0603]  27.18,68.71 0 top
R51  100k  [0603]  16.64,66.8 90 top
R52  2.2k  [0603]  28.45,53.66 180 bottom
R53  1k  [0603]  22.73,44.32 90 bottom
R54  1k  [0603]  35.43,47.75 90 bottom
R55  4.7k  [0603]  50.36,66.8 90 top
R56  4.7k  [0603]  51.82,66.8 90 top
R57  10k  [0603]  46.1,56.64 180 top
R58  1k  [0603]  45.47,51.69 90 bottom
R59  100k  [0603]  59.44,68.71 0 top
R60  100k  [0603]  48.9,66.8 90 top
R61  2.2k  [0603]  60.71,53.66 180 bottom
R62  1k  [0603]  54.99,44.32 90 bottom
R63  1k  [0603]  67.69,47.75 90 bottom
R64  4.7k  [0603]  82.61,66.8 90 top
R65  4.7k  [0603]  84.07,66.8 90 top
R66  10k  [0603]  78.36,56.64 180 top
R67  1k  [0603]  77.72,51.69 90 bottom
R68  100k  [0603]  91.69,68.71 0 top
R69  100k  [0603]  81.15,66.8 90 top
R70  2.2k  [0603]  92.96,53.66 180 bottom
R71  1k  [0603]  87.25,44.32 90 bottom
R72  1k  [0603]  99.95,47.75 90 bottom
R73  4.7k  [0603]  114.87,66.8 90 top
R74  4.7k  [0603]  116.33,66.8 90 top
R75  10k  [0603]  110.62,56.64 180 top
R76  1k  [0603]  109.98,51.69 90 bottom
R77  100k  [0603]  123.95,68.71 0 top
R78  100k  [0603]  113.41,66.8 90 top
R79  2.2k  [0603]  125.22,53.66 180 bottom
R80  1k  [0603]  119.51,44.32 90 bottom
R81  1k  [0603]  132.21,47.75 90 bottom
R82  4.7k  [0603]  147.13,66.8 90 top
R83  4.7k  [0603]  148.59,66.8 90 top
R84  10k  [0603]  142.88,56.64 180 top
R85  1k  [0603]  142.24,51.69 90 bottom
R86  100k  [0603]  156.21,68.71 0 top
R87  100k  [0603]  145.67,66.8 90 top
R88  2.2k  [0603]  157.48,53.66 180 bottom
R89  1k  [0603]  151.76,44.32 90 bottom
R90  1k  [0603]  164.47,47.75 90 bottom
R91  4.7k  [0603]  18.1,99.57 90 top
R92  4.7k  [0603]  19.56,99.57 90 top
R93  10k  [0603]  13.84,89.41 180 top
R94  1k  [0603]  13.21,84.45 90 bottom
R95  100k  [0603]  27.18,101.47 0 top
R96  100k  [0603]  16.64,99.57 90 top
R97  2.2k  [0603]  28.45,86.42 180 bottom
R98  1k  [0603]  22.73,77.09 90 bottom
R99  1k  [0603]  35.43,80.52 90 bottom
R100  4.7k  [0603]  50.36,99.57 90 top
R101  4.7k  [0603]  51.82,99.57 90 top
R102  10k  [0603]  46.1,89.41 180 top
R103  1k  [0603]  45.47,84.45 90 bottom
R104  100k  [0603]  59.44,101.47 0 top
R105  100k  [0603]  48.9,99.57 90 top
R106  2.2k  [0603]  60.71,86.42 180 bottom
R107  1k  [0603]  54.99,77.09 90 bottom
R108  1k  [0603]  67.69,80.52 90 bottom
R109  4.7k  [0603]  82.61,99.57 90 top
R110  4.7k  [0603]  84.07,99.57 90 top
R111  10k  [0603]  78.36,89.41 180 top
R112  1k  [0603]  77.72,84.45 90 bottom
R113  100k  [0603]  91.69,101.47 0 top
R114  100k  [0603]  81.15,99.57 90 top
R115  2.2k  [0603]  92.96,86.42 180 bottom
R116  1k  [0603]  87.25,77.09 90 bottom
R117  1k  [0603]  99.95,80.52 90 bottom
R118  4.7k  [0603]  114.87,99.57 90 top
R119  4.7k  [0603]  116.33,99.57 90 top
R120  10k  [0603]  110.62,89.41 180 top
R121  1k  [0603]  109.98,84.45 90 bottom
R122  100k  [0603]  123.95,101.47 0 top
R123  100k  [0603]  113.41,99.57 90 top
R124  2.2k  [0603]  125.22,86.42 180 bottom
R125  1k  [0603]  119.51,77.09 90 bottom
R126  1k  [0603]  132.21,80.52 90 bottom
R127  4.7k  [0603]  147.13,99.57 90 top
R128  4.7k  [0603]  148.59,99.57 90 top
R129  10k  [0603]  142.88,89.41 180 top
R130  1k  [0603]  142.24,84.45 90 bottom
R131  100k  [0603]  156.21,101.47 0 top
R132  100k  [0603]  145.67,99.57 90 top
R133  2.2k  [0603]  157.48,86.42 180 bottom
R134  1k  [0603]  151.76,77.09 90 bottom
R135  1k  [0603]  164.47,80.52 90 bottom
R136  4.7k  [0603]  18.1,132.33 90 top
R137  4.7k  [0603]  19.56,132.33 90 top
R138  10k  [0603]  13.84,122.17 180 top
R139  1k  [0603]  13.21,117.22 90 bottom
R140  100k  [0603]  27.18,134.24 0 top
R141  100k  [0603]  16.64,132.33 90 top
R142  2.2k  [0603]  28.45,119.19 180 bottom
R143  1k  [0603]  22.73,109.86 90 bottom
R144  1k  [0603]  35.43,113.28 90 bottom
R145  4.7k  [0603]  50.36,132.33 90 top
R146  4.7k  [0603]  51.82,132.33 90 top
R147  10k  [0603]  46.1,122.17 180 top
R148  1k  [0603]  45.47,117.22 90 bottom
R149  100k  [0603]  59.44,134.24 0 top
R150  100k  [0603]  48.9,132.33 90 top
R151  2.2k  [0603]  60.71,119.19 180 bottom
R152  1k  [0603]  54.99,109.86 90 bottom
R153  1k  [0603]  67.69,113.28 90 bottom
R154  4.7k  [0603]  82.61,132.33 90 top
R155  4.7k  [0603]  84.07,132.33 90 top
R156  10k  [0603]  78.36,122.17 180 top
R157  1k  [0603]  77.72,117.22 90 bottom
R158  100k  [0603]  91.69,134.24 0 top
R159  100k  [0603]  81.15,132.33 90 top
R160  2.2k  [0603]  92.96,119.19 180 bottom
R161  1k  [0603]  87.25,109.86 90 bottom
R162  1k  [0603]  99.95,113.28 90 bottom
R163  4.7k  [0603]  114.87,132.33 90 top
R164  4.7k  [0603]  116.33,132.33 90 top
R165  10k  [0603]  110.62,122.17 180 top
R166  1k  [0603]  109.98,117.22 90 bottom
R167  100k  [0603]  123.95,134.24 0 top
R168  100k  [0603]  113.41,132.33 90 top
R169  2.2k  [0603]  125.22,119.19 180 bottom
R170  1k  [0603]  119.51,109.86 90 bottom
R171  1k  [0603]  132.21,113.28 90 bottom
R172  4.7k  [0603]  147.13,132.33 90 top
R173  4.7k  [0603]  148.59,132.33 90 top
R174  10k  [0603]  142.88,122.17 180 top
R175  1k  [0603]  142.24,117.22 90 bottom
R176  100k  [0603]  156.21,134.24 0 top
R177  100k  [0603]  145.67,132.33 90 top
R178  2.2k  [0603]  157.48,119.19 180 bottom
R179  1k  [0603]  151.76,109.86 90 bottom
R180  1k  [0603]  164.47,113.28 90 bottom
S1  [SWITCH-SPST-SMD-A]  9.78,18.29 270 bottom
S2  [SWITCH-SPST-SMD-A]  42.04,18.29 270 bottom
S3  [SWITCH-SPST-SMD-A]  74.3,18.29 270 bottom
S4  [SWITCH-SPST-SMD-A]  106.55,18.29 270 bottom
S5  [SWITCH-SPST-SMD-A]  138.81,18.29 270 bottom
S6  [SWITCH-SPST-SMD-A]  9.78,51.05 270 bottom
S7  [SWITCH-SPST-SMD-A]  42.04,51.05 270 bottom
S8  [SWITCH-SPST-SMD-A]  74.3,51.05 270 bottom
S9  [SWITCH-SPST-SMD-A]  106.55,51.05 270 bottom
S10  [SWITCH-SPST-SMD-A]  138.81,51.05 270 bottom
S11  [SWITCH-SPST-SMD-A]  9.78,83.82 270 bottom
S12  [SWITCH-SPST-SMD-A]  42.04,83.82 270 bottom
S13  [SWITCH-SPST-SMD-A]  74.3,83.82 270 bottom
S14  [SWITCH-SPST-SMD-A]  106.55,83.82 270 bottom
S15  [SWITCH-SPST-SMD-A]  138.81,83.82 270 bottom
S16  [SWITCH-SPST-SMD-A]  9.78,116.59 270 bottom
S17  [SWITCH-SPST-SMD-A]  42.04,116.59 270 bottom
S18  [SWITCH-SPST-SMD-A]  74.3,116.59 270 bottom
S19  [SWITCH-SPST-SMD-A]  106.55,116.59 270 bottom
S20  [SWITCH-SPST-SMD-A]  138.81,116.59 270 bottom
TP1  TEST-POINT3  [PAD.03X.03]  17.02,25.78 0 top
TP2  TEST-POINT3  [PAD.03X.03]  17.02,28.32 0 top
TP3  TEST-POINT3  [PAD.03X.03]  49.28,25.78 0 top
TP4  TEST-POINT3  [PAD.03X.03]  49.28,28.32 0 top
TP5  TEST-POINT3  [PAD.03X.03]  81.53,25.78 0 top
TP6  TEST-POINT3  [PAD.03X.03]  81.53,28.32 0 top
TP7  TEST-POINT3  [PAD.03X.03]  113.79,25.78 0 top
TP8  TEST-POINT3  [PAD.03X.03]  113.79,28.32 0 top
TP9  TEST-POINT3  [PAD.03X.03]  146.05,25.78 0 top
TP10  TEST-POINT3  [PAD.03X.03]  146.05,28.32 0 top
TP11  TEST-POINT3  [PAD.03X.03]  17.02,58.55 0 top
TP12  TEST-POINT3  [PAD.03X.03]  17.02,61.09 0 top
TP13  TEST-POINT3  [PAD.03X.03]  49.28,58.55 0 top
TP14  TEST-POINT3  [PAD.03X.03]  49.28,61.09 0 top
TP15  TEST-POINT3  [PAD.03X.03]  81.53,58.55 0 top
TP16  TEST-POINT3  [PAD.03X.03]  81.53,61.09 0 top
TP17  TEST-POINT3  [PAD.03X.03]  113.79,58.55 0 top
TP18  TEST-POINT3  [PAD.03X.03]  113.79,61.09 0 top
TP19  TEST-POINT3  [PAD.03X.03]  146.05,58.55 0 top
TP20  TEST-POINT3  [PAD.03X.03]  146.05,61.09 0 top
TP21  TEST-POINT3  [PAD.03X.03]  17.02,91.31 0 top
TP22  TEST-POINT3  [PAD.03X.03]  17.02,93.85 0 top
TP23  TEST-POINT3  [PAD.03X.03]  49.28,91.31 0 top
TP24  TEST-POINT3  [PAD.03X.03]  49.28,93.85 0 top
TP25  TEST-POINT3  [PAD.03X.03]  81.53,91.31 0 top
TP26  TEST-POINT3  [PAD.03X.03]  81.53,93.85 0 top
TP27  TEST-POINT3  [PAD.03X.03]  113.79,91.31 0 top
TP28  TEST-POINT3  [PAD.03X.03]  113.79,93.85 0 top
TP29  TEST-POINT3  [PAD.03X.03]  146.05,91.31 0 top
TP30  TEST-POINT3  [PAD.03X.03]  146.05,93.85 0 top
TP31  TEST-POINT3  [PAD.03X.03]  17.02,124.08 0 top
TP32  TEST-POINT3  [PAD.03X.03]  17.02,126.62 0 top
TP33  TEST-POINT3  [PAD.03X.03]  49.28,124.08 0 top
TP34  TEST-POINT3  [PAD.03X.03]  49.28,126.62 0 top
TP35  TEST-POINT3  [PAD.03X.03]  81.53,124.08 0 top
TP36  TEST-POINT3  [PAD.03X.03]  81.53,126.62 0 top
TP37  TEST-POINT3  [PAD.03X.03]  113.79,124.08 0 top
TP38  TEST-POINT3  [PAD.03X.03]  113.79,126.62 0 top
TP39  TEST-POINT3  [PAD.03X.03]  146.05,124.08 0 top